# Altium PCB 16515.PcbDoc (part 1 of 2)
Units mil, origin at the board's own origin, x right, y up, seen from the top; angles counter-clockwise.
Board outline 3543.31 x 2500 mil, 6 copper layers (Top Layer, Layer 1, SIG_1, SIG_2, Layer 2, Bottom Layer), stack 56.912 mil thick; 73 components, 58 nets, 263 pads, 207 vias.
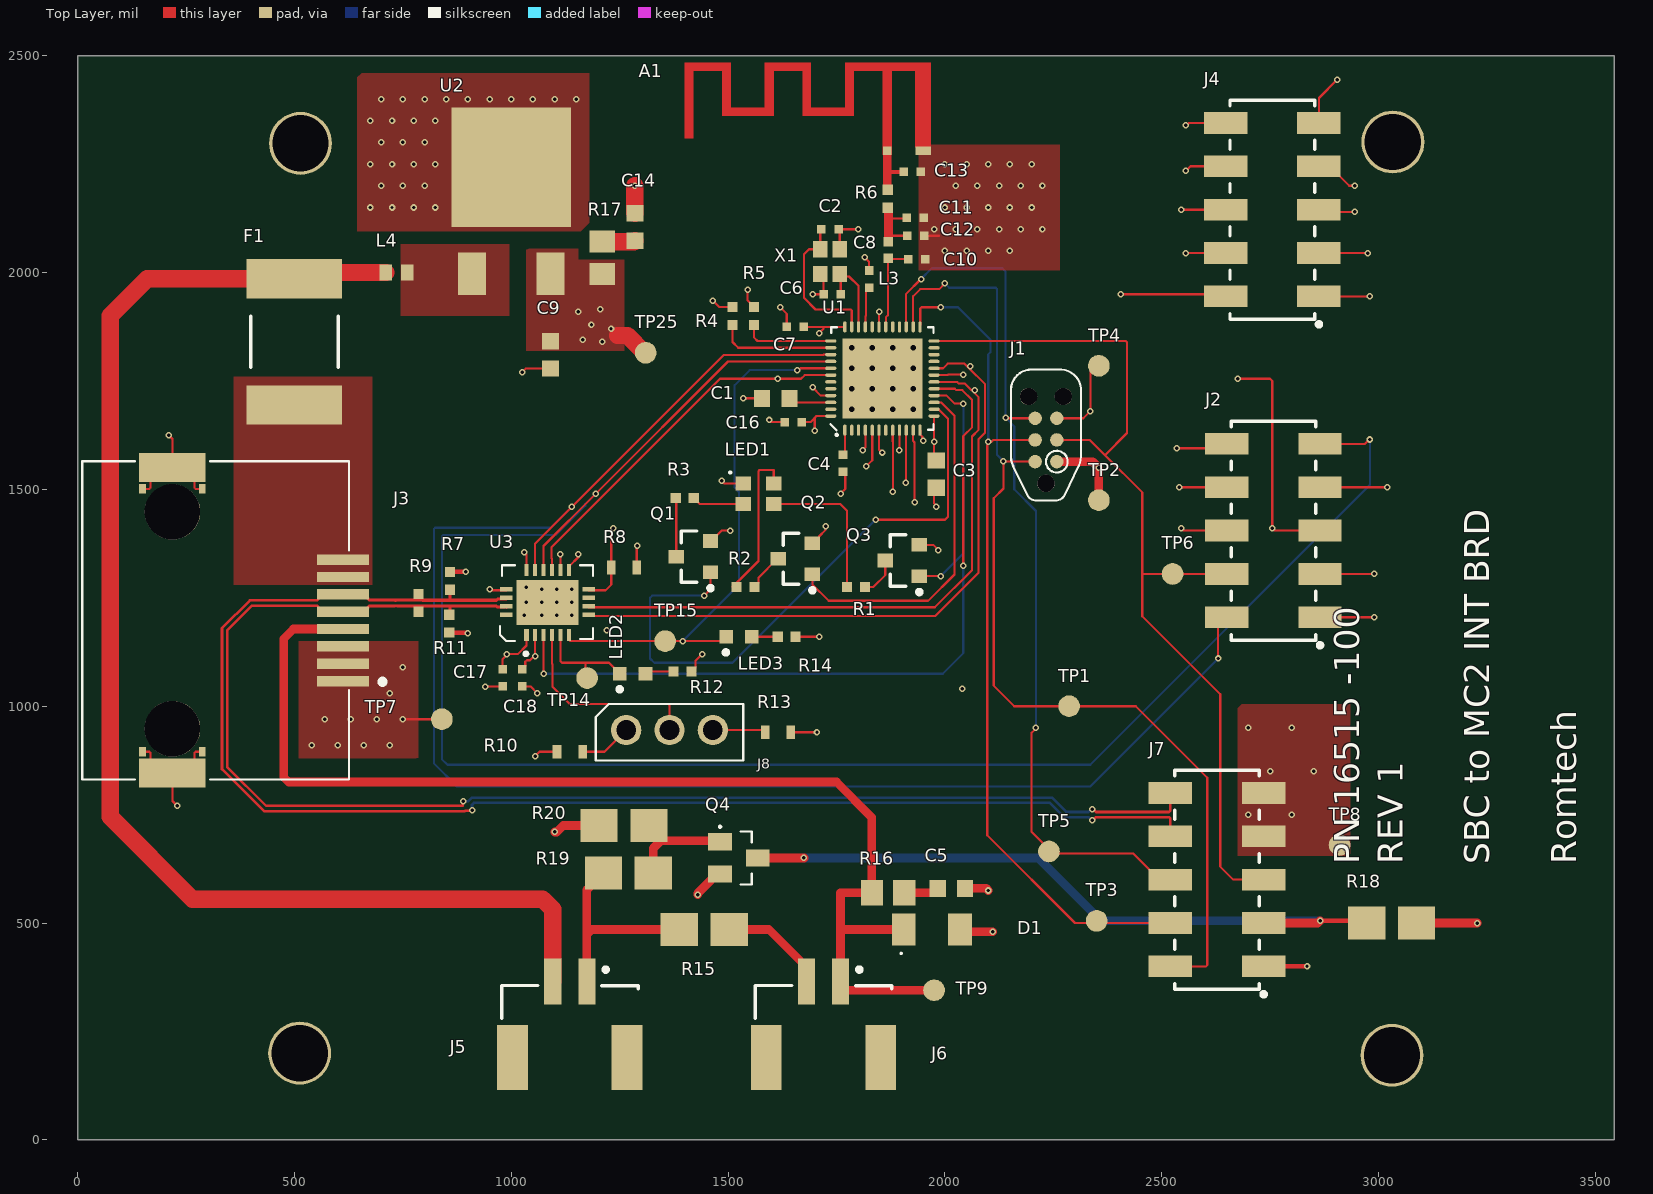
[diagram p0: Top Layer view]
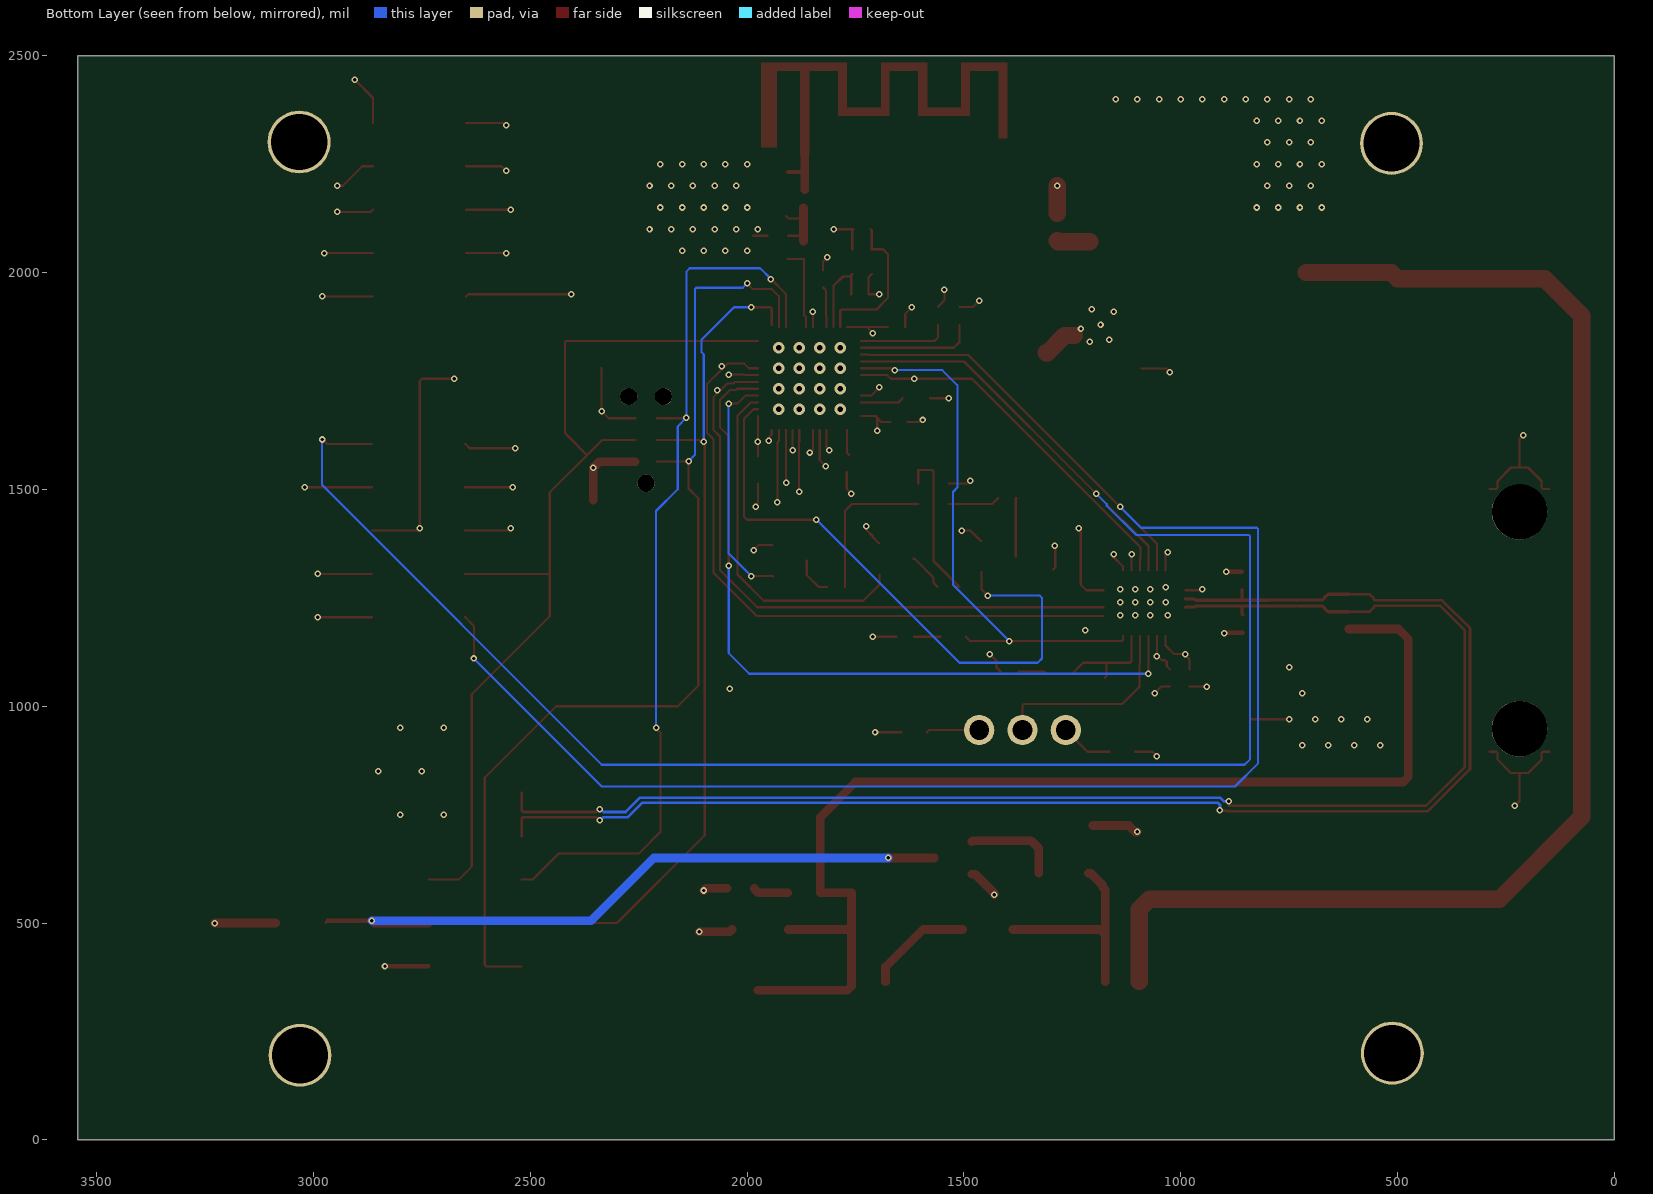
[diagram p1: Bottom Layer view, seen from below]
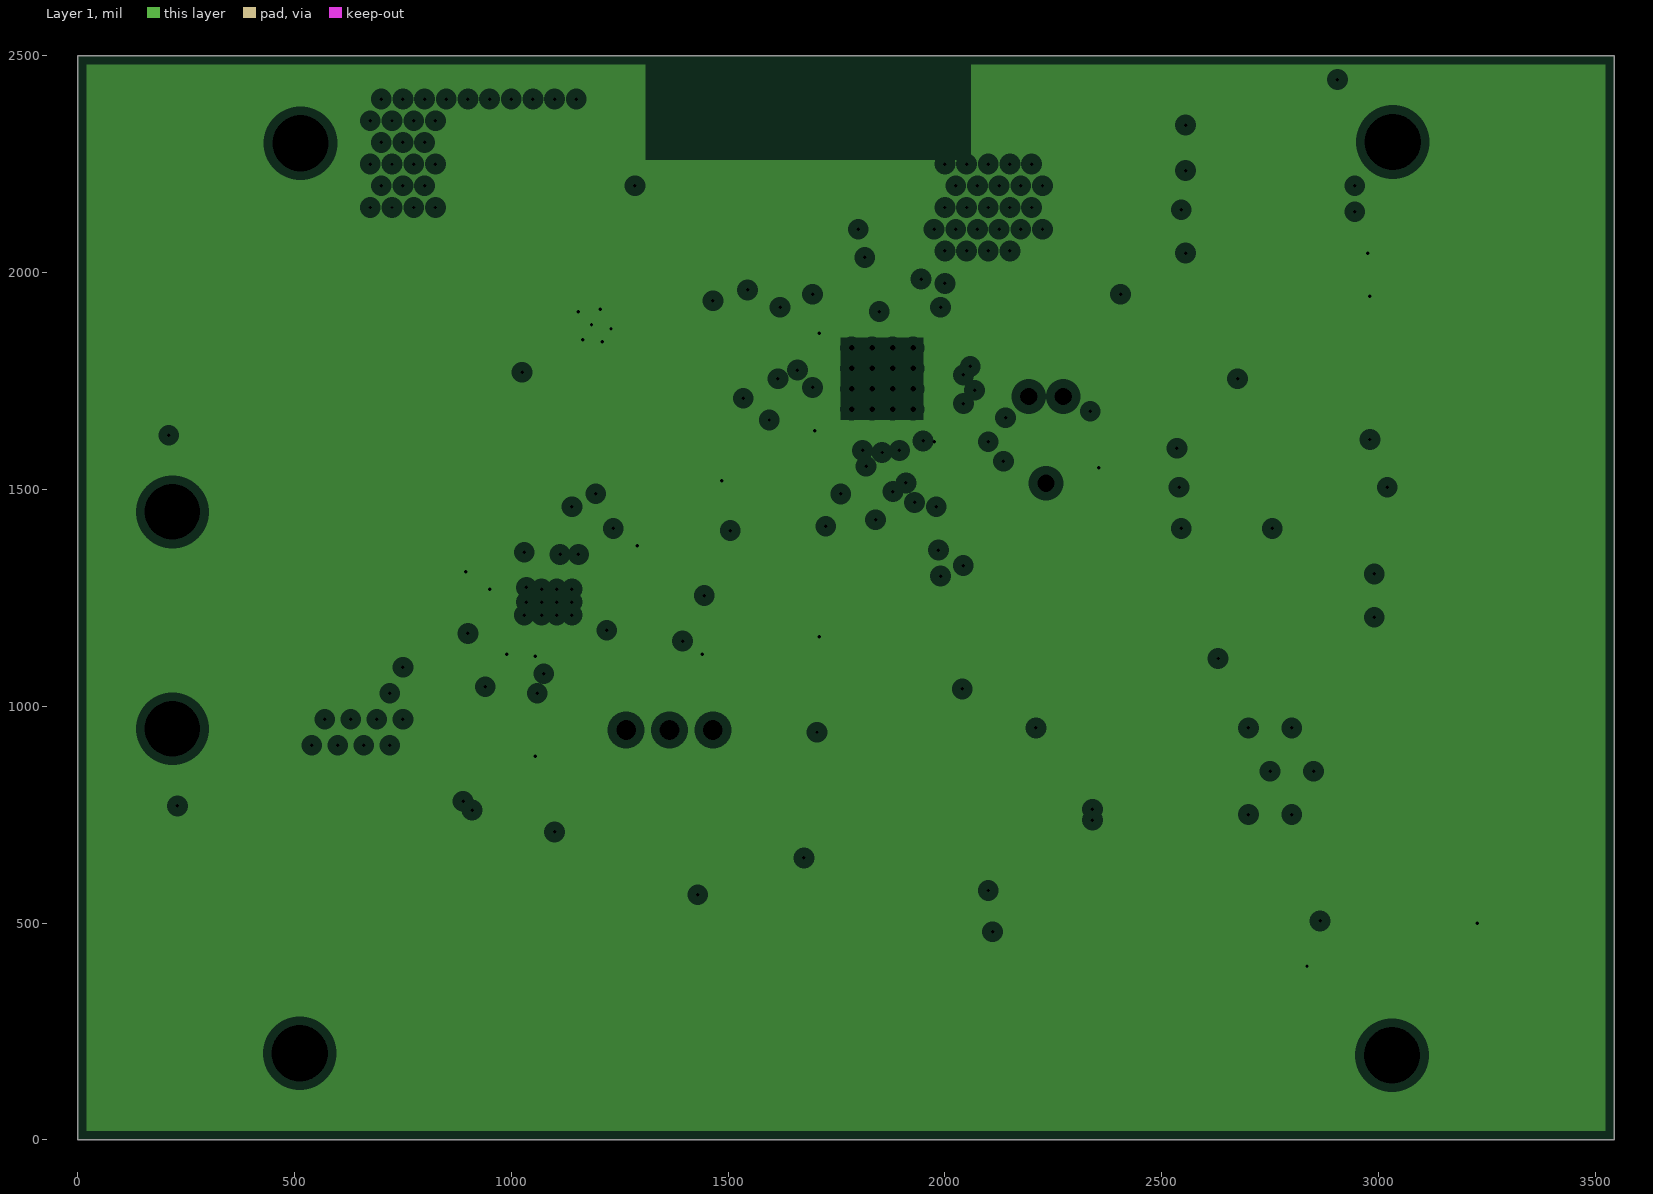
[diagram p2: Layer 1, clearances drawn from the general rule]
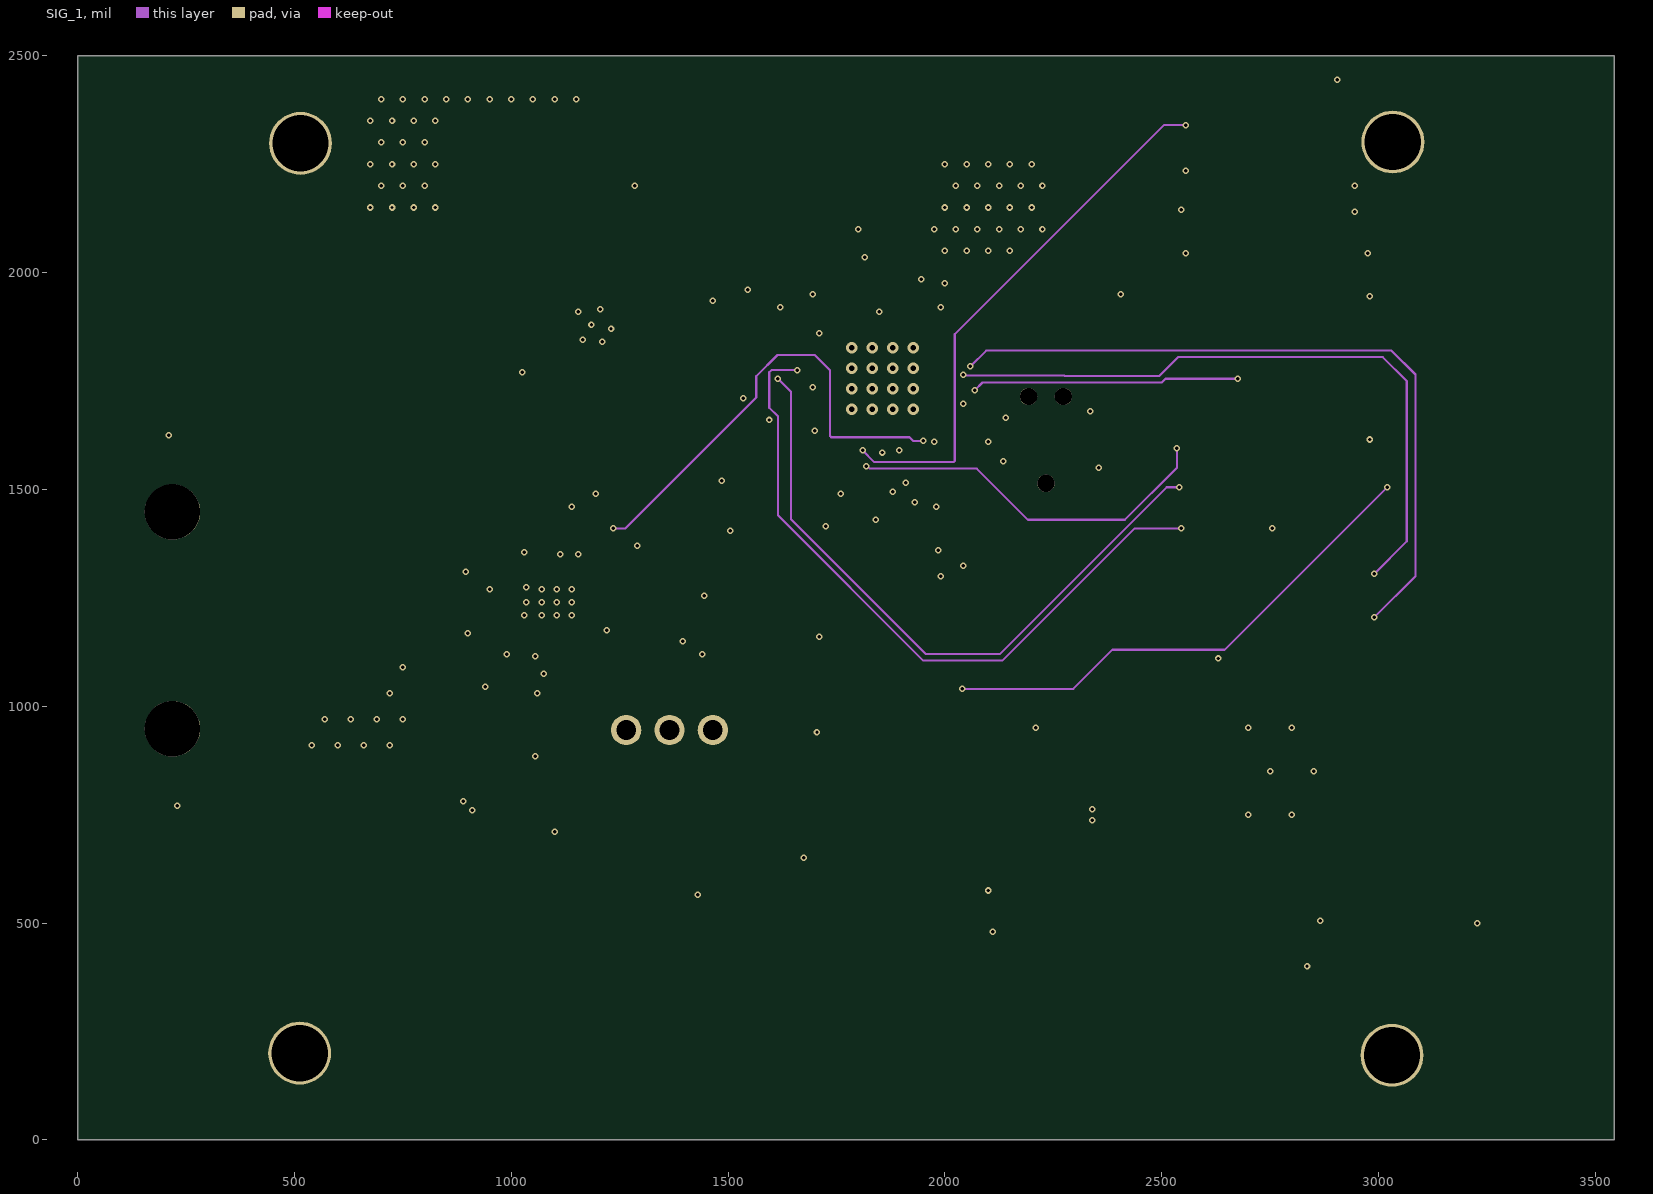
[diagram p3: SIG_1]
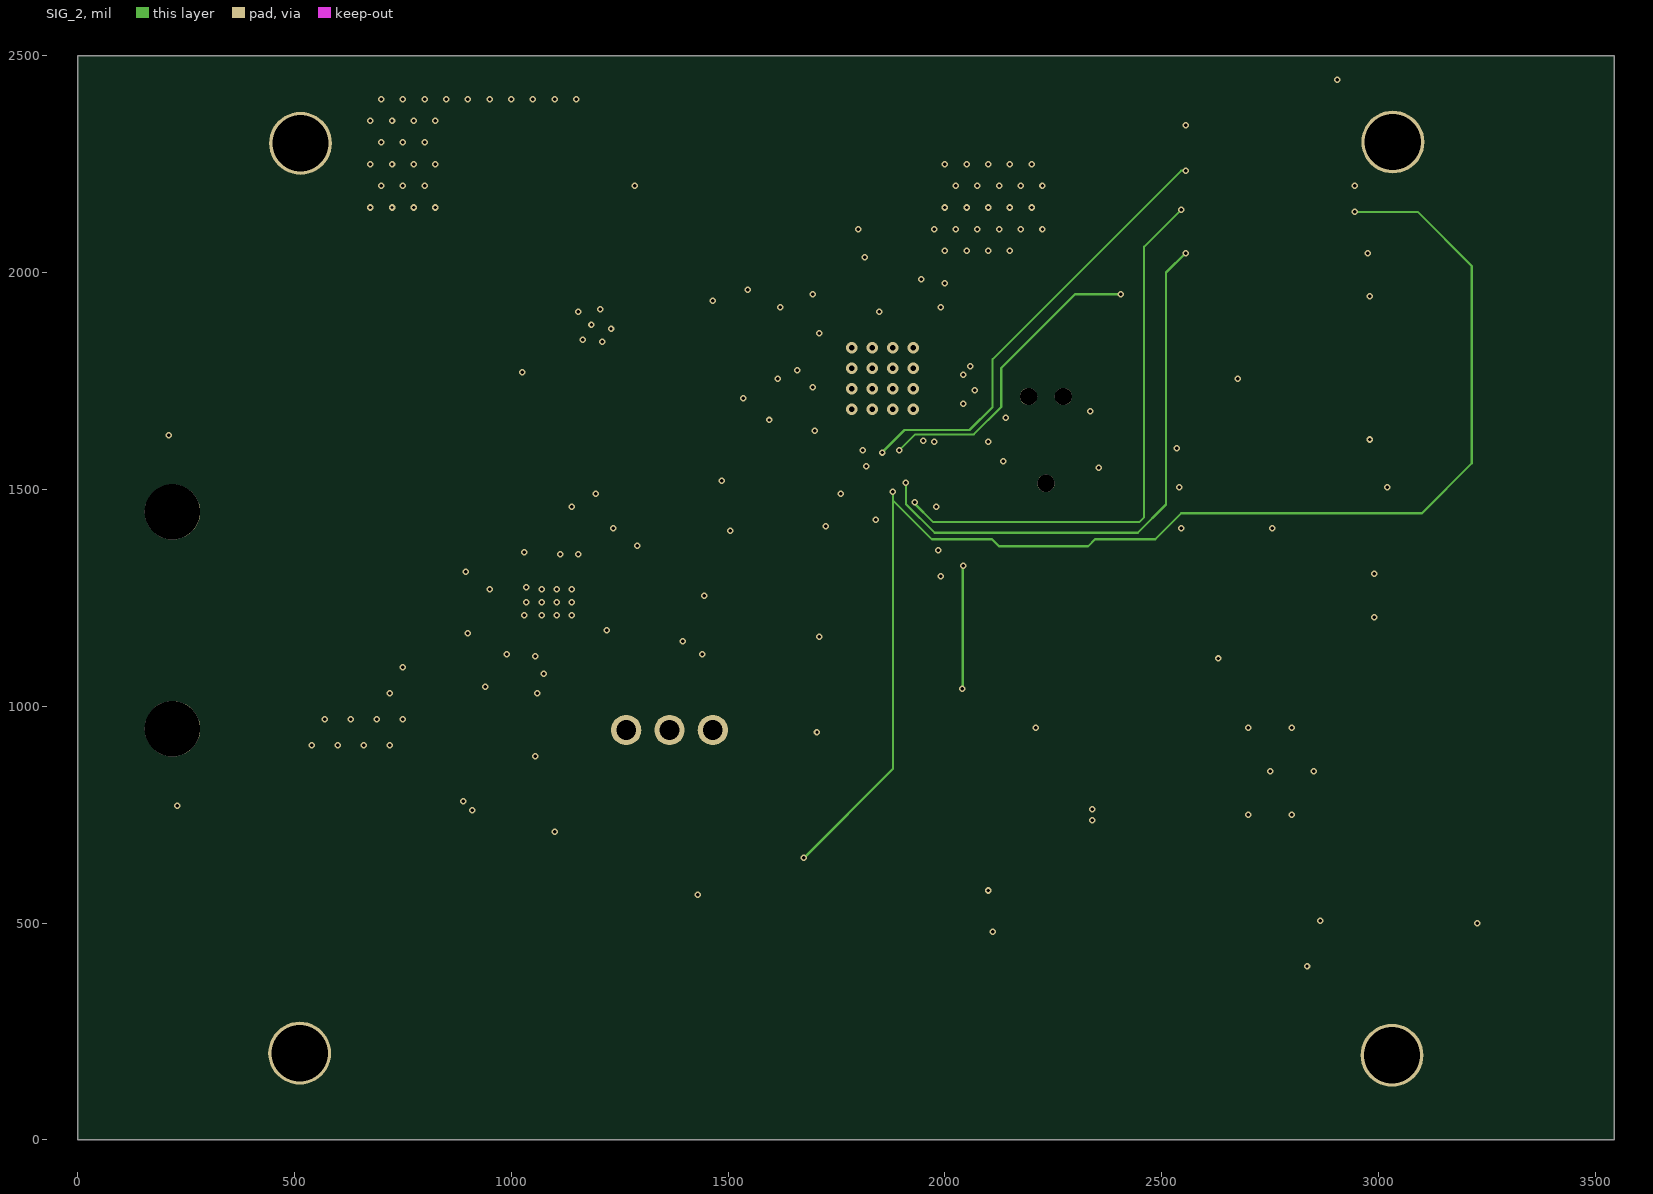
[diagram p4: SIG_2]
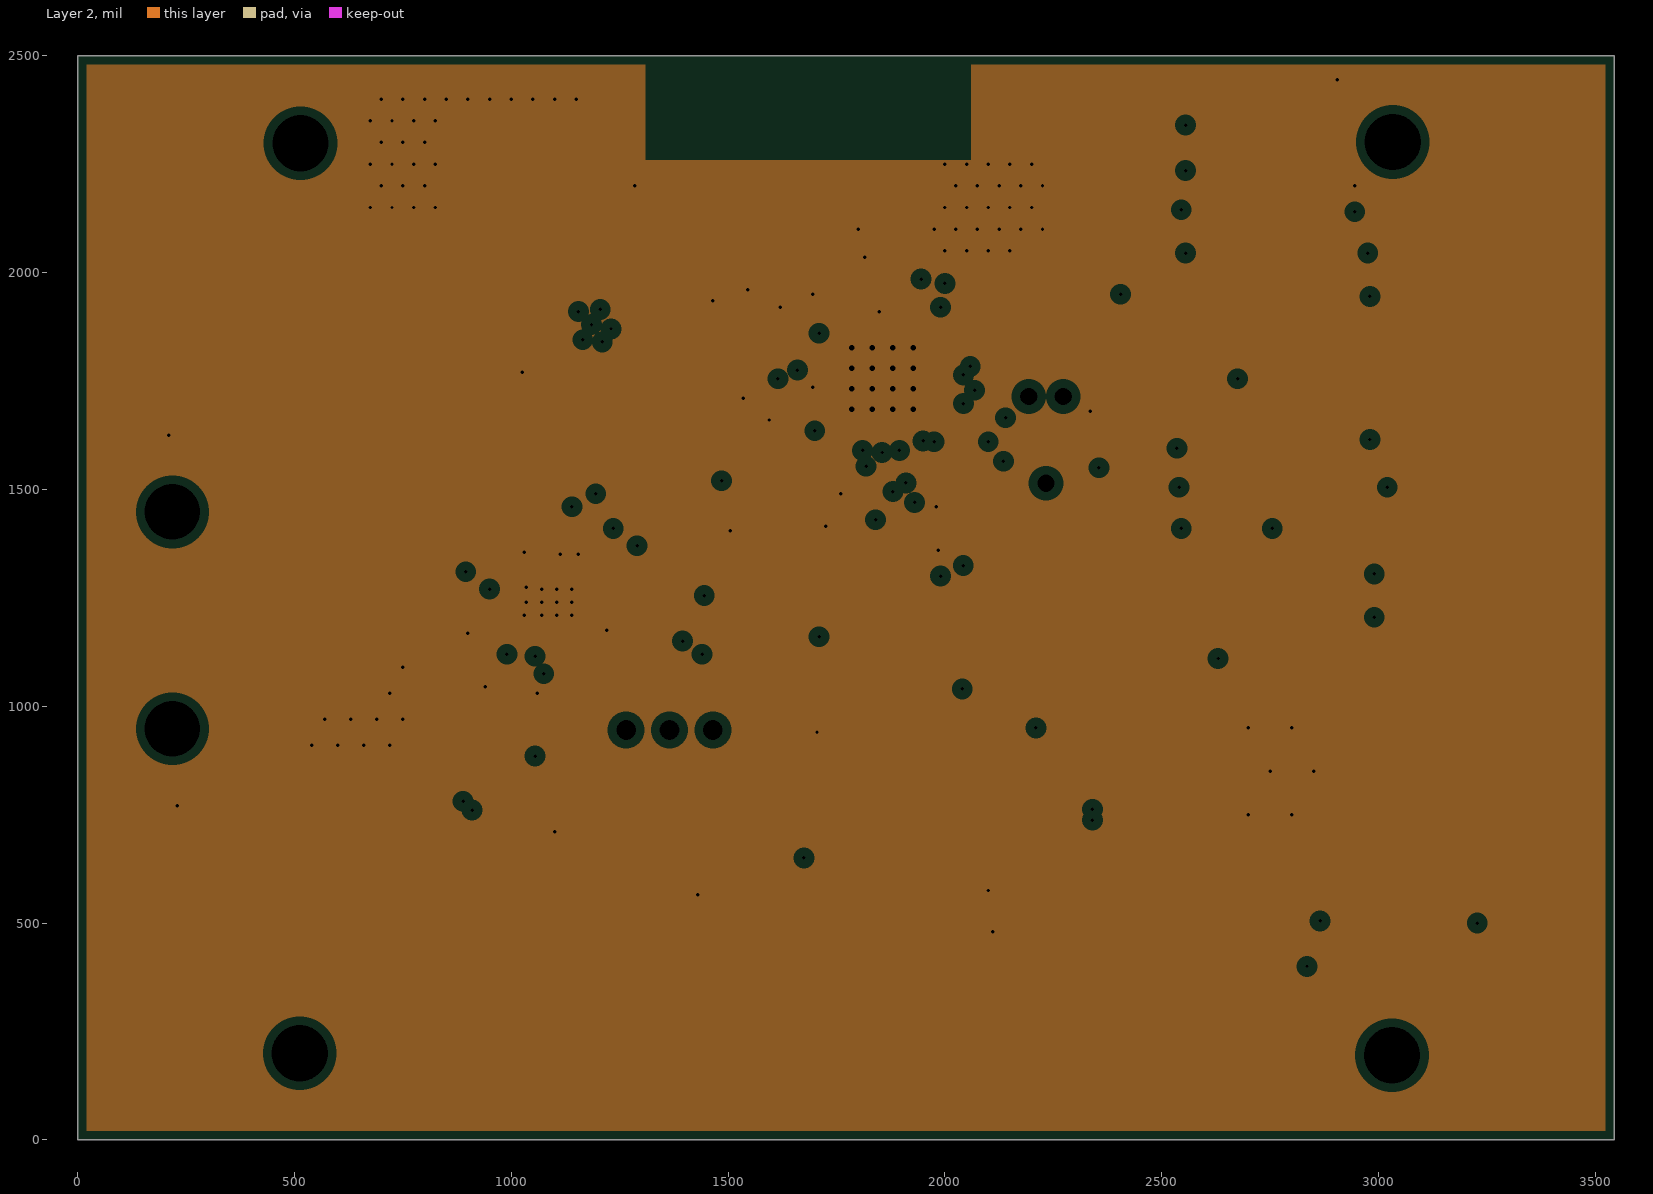
[diagram p5: Layer 2, clearances drawn from the general rule]
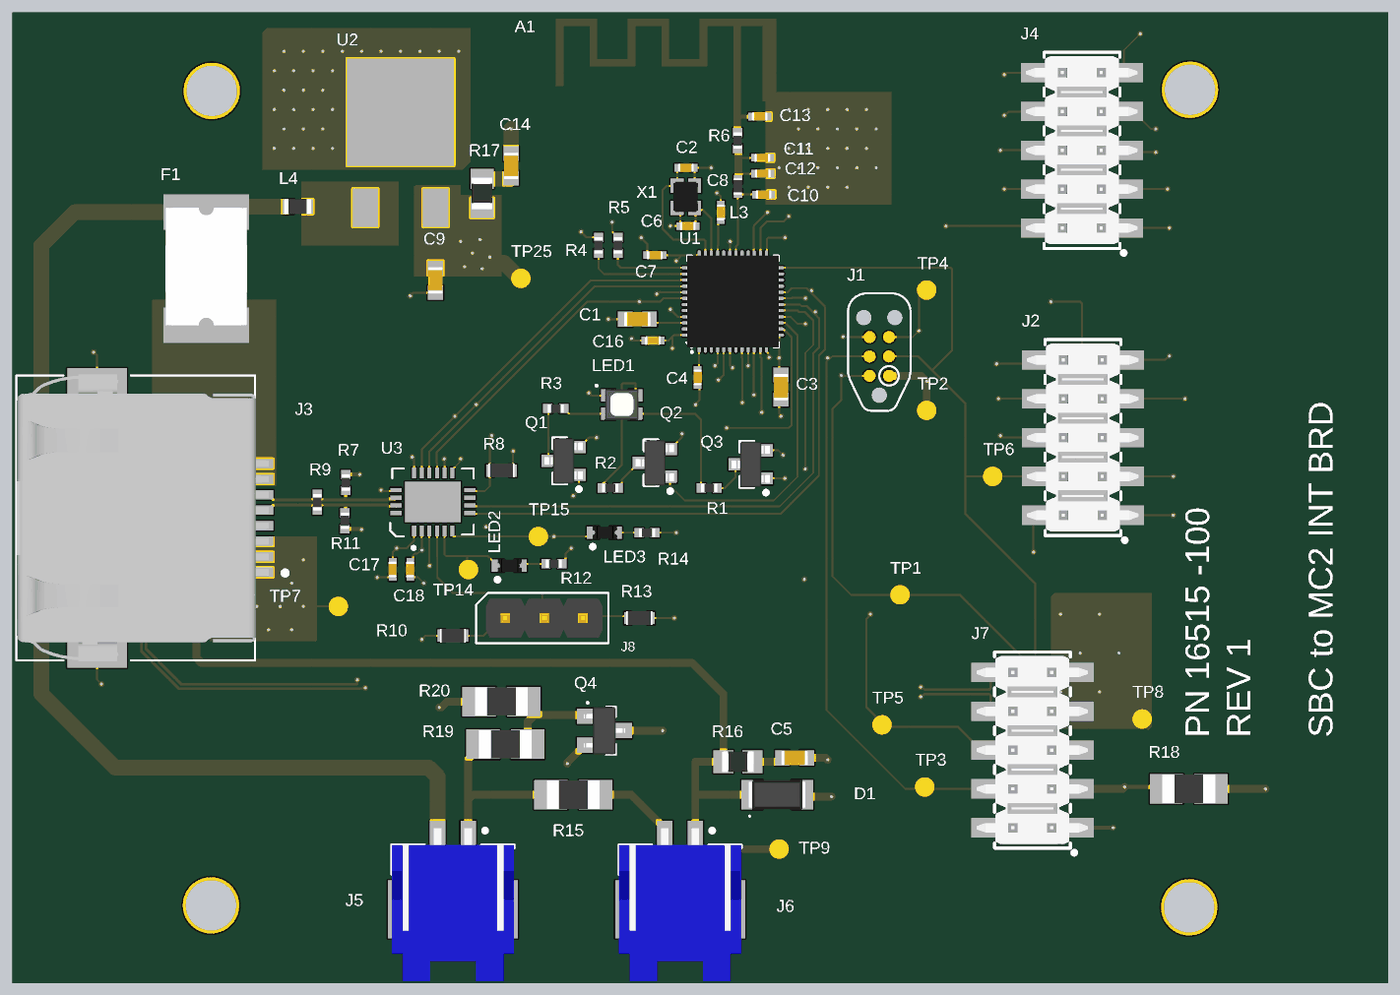
[diagram p6: 3D render of the assembled board from above, using the file's embedded part models]

## Layer stack, top to bottom
Top Solder: solder mask 0.4, Solder Resist, Dk 3.5
Top Layer: signal copper 1.4
Dielectric 2: prepreg 8, PP-006, Dk 4.1
Layer 1: plane copper 1.378, net 3.3V
Dielectric 4: prepreg 10, PP-006, Dk 4.1
SIG_1: signal copper 1.378
Dielectric 1: dielectric 12.6, FR-4, Dk 4.8
SIG_2: signal copper 1.378
Dielectric 5: prepreg 10, PP-006, Dk 4.1
Layer 2: plane copper 1.378, net GND
Dielectric 3: prepreg 8, PP-006, Dk 4.1
Bottom Layer: signal copper 1.4
Bottom Solder: solder mask 0.4, Solder Resist, Dk 3.5

## Board outline
0.25,0 0.25,2500 3543.56,2500 3543.56,0

## Design rules (kind name [scope] priority, off if disabled: settings)
Clearance [All] p1: gap=5 ignorepadtopadclearanceinfootprint=FALSE
DiffPairsRouting [All] p1: maxlimit=10 minlimit=6 mostfreqgap=6 toplayer_minwidth=6 toplayer_maxwidth=7.45 toplayer_prefwidth=7.45 midlayer1_minwidth=6 midlayer1_maxwidth=7.45 midlayer1_prefwidth=7.45 midlayer2_minwidth=6 midlayer2_maxwidth=7.45 midlayer2_prefwidth=7.45 bottomlayer_minwidth=6 bottomlayer_maxwidth=7.45 bottomlayer_prefwidth=7.45 maxuncoupledlength=500
HoleSize [All] p1: absolutevalues=TRUE maxlimit=200 minlimit=1 maxpercent=80.000 minpercent=20.000
MinimumSolderMaskSliver U3_paste [TouchesRoom('U3_room')] p1: minsoldermaskwidth=0
MinimumSolderMaskSliver J3_paste [TouchesRoom('J3_room')] p2: minsoldermaskwidth=0
MinimumSolderMaskSliver [All] p3: minsoldermaskwidth=2
PlaneClearance [All] p1: clearance=20
PlaneConnect PlaneConnect_1 [All] p1: planeconnectstyle=Direct reliefexpansion=20 reliefentries=4 reliefconductorwidth=10 reliefairgap=10
PlaneConnect [InComponent('U1')] p2: planeconnectstyle=Direct reliefexpansion=20 reliefentries=4 reliefconductorwidth=10 reliefairgap=10
PolygonConnect [All] p1: connectstyle=Direct reliefconductorwidth=10 reliefentries=4 polygonreliefangle="90 Angle" airgapwidth=10
RoomDefinition U3_room [False] p1: confinementstyle=ConfineIn formatcopy=TRUE lockcomponents=FALSE outline 926,1364 1224,1364 1224,1111 926,1111
RoomDefinition J3_room [False] p2: confinementstyle=ConfineIn formatcopy=TRUE lockcomponents=FALSE outline 3,1613 759,1613 759,705 3,705
RoutingVias [All] p1: holewidth=8 width=15 viastyle="Through Hole" minholewidth=8 minwidth=15 maxholewidth=10 maxwidth=20
ShortCircuit [InNet('RF') and InPadClass('A1-ANT') vs InNet('GND')] p1: allowed=TRUE
ShortCircuit ShortCircuit_1 [All] p2: allowed=FALSE
SilkToSolderMaskClearance [IsPad] p1: minsilkscreentomaskgap=5 clearancetoexposedcopper=TRUE
SolderMaskExpansion [All] p1: expansion=4 istentingtop=FALSE
Width [All] p1: maxlimit=40 minlimit=5 preferedwidth=10
23 further rules are at their usual default settings.

## Classes and differential pairs
differential pair PC: +PC_P -PC_N

## Components (designator, comment, footprint, x,y, rotation, side; value= is the part's Value field where it differs from the comment)
A1 "MIFI Antenna" "BLE Antenna" 1867,2282 r270 top
C1 "1.0uF" CAPC0603X10N 1610,1710 r0 top
C2 "12pF" CAPC0402X06N 1735,2100 r0 top
C3 "4.7uF" CAPC0603X10N 1980,1535 r270 top
C4 "0.1uF" CAPC0402X06N 1765,1560 r270 top
C5 "100pF" CAPC0603X10N 2015,580 r0 top
C6 "12pF" CAPC0402X06N 1740,1950 r180 top
C7 "0.1uF" CAPC0402X06N 1655,1875 r180 top
C8 "100pF" CAPC0402X06N 1825,1985 r90 top
C9 "4.7uF" CAPC0603X10N 1090,1810 r90 top
C10 "0.8pF" CAPC0402X06N 1935,2031 r180 top
C11 "DNI" CAPC0402X06N 1932,2126 r0 top
C12 "DNI" CAPC0402X06N 1933,2085 r0 top
C13 "DNI" CAPC0402X06N 1925,2232 r0 top
C14 "100pF" CAPC0603X10N 1285,2105 r90 top
C16 "0.1uF" CAPC0402X06N 1650,1655 r180 top
C17 "4.7uF" CAPC0402X06N 980,1065.31 r90 top
C18 "1uF" CAPC0402X06N 1025,1065.31 r90 top
D1 "BZT52C12-13-F" SOD-123/Mini-SMA 1970,485 r180 top
F1 "Fuse" FUSE2920 500,1840 r90 top
J1 "SWD" TC2030-IDC-NL 2233,1614 r90 top
J2 "95278-101A10LF" Amphenol_95278-101A10LF_0 2757.52,1405 r90 top
J3 "6339160-1" TE_6339160-1 612.4,1198 r270 top
J4 "95278-101A10LF" Amphenol_95278-101A10LF_0 2755,2145 r90 top
J5 "SM02B-PASS-TBT(LF)(SN)" SM02B-PASS-TBT(LF)(SN) 1135,180 r180 top
J6 "SM02B-PASS-TBT(LF)(SN)" SM02B-PASS-TBT(LF)(SN) 1720,180 r180 top
J7 "95278-101A10LF" Amphenol_95278-101A10LF_0 2627.52,600 r90 top
J8 "3 POS Header" 3_POS_Header 1265,945 r0 top
L3 "3.9nH" INDC0402X04N 1869,2052 r90 top
L4 "330 Ohms @100 Mhz" INDC0603X10N 735.39,2000 r0 top
LED1 "ASMB-KTF0-0A306" ASMB-KTF0-0A306 1570,1490 r0 top
LED2 "GREEN" 0603 1280,1075 r90 top
LED3 "GREEN" 0603 1525,1160 r90 top
Q1 "2SK3018T106" SOT23 1420,1345 r180 top
Q2 "2SK3018T106" SOT23 1655,1340 r180 top
Q3 "2SK3018T106" SOT23 1901.65,1336.02 r180 top
Q4 "BSS138K" SOT-23-3 1525,650 r0 top
R1 "1K" RESC0402X04N 1795,1275 r180 top
R2 "1K" RESC0402X04N 1540,1275 r180 top
R3 "1K" RESC0402X04N 1400,1480 r0 top
R4 "1K" RESC0402X04N 1510,1900 r90 top
R5 "1K" RESC0402X04N 1560,1900 r90 top
R6 "0" RESC0402X04N 1868,2170 r90 top
R7 "620R" RESC0402X04N 859,1289 r90 top
R8 "10K" RESC0603X06N 1260,1320 r0 top
R9 "110R" RESC0402X04N 786,1238.33 r90 top
R10 "10K" RESC0603X06N 1135,895 r0 top
R11 "620R" RESC0402X04N 857,1190.33 r90 top
R12 "1K" RESC0402X04N 1395,1080 r180 top
R13 "10K" RESC0603X06N 1615,940 r180 top
R14 "1K" RESC0402X04N 1635,1160 r180 top
R15 "2K" RESC1206X09N 1445,485 r180 top
R16 "1k" RESC0805X06N 1870,570 r0 top
R17 "1k" RESC0805X06N 1210,2035 r90 top
R18 "2K" RESC1206X09N 3030,500 r180 top
R19 "10K" RESC1206X09N 1270,615 r180 top
R20 "1.5 K" RESC1206X09N 1260,725 r180 top
TP1 "=VALUE" "Test Point" 2286.36,1000 r90 top
TP2 "=VALUE" "Test Point" 2355,1475 r90 top
TP3 "=VALUE" "Test Point" 2350,505 r90 top
TP4 "=VALUE" "Test Point" 2355,1785 r90 top
TP5 "=VALUE" "Test Point" 2240,665 r90 top
TP6 "=VALUE" "Test Point" 2525,1305 r90 top
TP7 "=VALUE" "Test Point" 840,970 r90 top
TP8 "=VALUE" "Test Point" 2910,680 r90 top
TP9 "=VALUE" "Test Point" 1975,345 r90 top
TP14 "=VALUE" "Test Point" 1175,1065 r90 top
TP15 "=VALUE" "Test Point" 1355,1150 r270 top
TP25 "=VALUE" "Test Point" 1310,1815 r90 top
U1 "NRF52832-QFAA-R" QFN40P600X600X90-48N 1855.91,1755.63 r90 top
U2 "BA033CC0FP-E2" TO252-3_BA033CC0FP-E2 1000,2120 r0 top
U3 "LTC4331CUFD#PBF" 20-WFQFN 1083.68,1239.21 r0 top
X1 "32MHz" BT-XTAL_2016 1735,2025 r90 top

## Footprints (in the part's own frame and the unit in brackets; to place one, negate y for a bottom-side part, rotate by r counter-clockwise, add the part's x,y. Pads: shape width x height; smd on the part's side, far side on the other; paste and mask are expansions set on the pad)
3_POS_Header [mil] "100_mil_pitch"
  round 70 hole 45.28: 1(0,0) 2(100,0) 3(200,0)
  silkscreen extent -70,-70 270,60, body extent -45,-55 255,45, height 337
20-WFQFN [mil]
  rect 11.8x27.6 smd: 1(-48.68,-74.8)
  rect 9.8x27.6 smd: 2(-29,-74.8) 3(-9.31,-74.8) 4(10.38,-74.8) 5(30.06,-74.8) 6(49.75,-74.8) 11(49.75,74.8) 12(30.06,74.8) 13(10.38,74.8) 14(-9.31,74.8) 15(-29,74.8) 16(-48.68,74.8)
  rect 29x11 smd: 7(94.98,-28.5) 8(94.98,-8.8) 9(94.98,10.9) 10(94.98,30.6) 17(-94.98,30.6) 18(-94.98,10.9) 19(-94.98,-8.8) 20(-94.98,-28.5)
  rect 143.7x104.33 smd: EP(0,0)
  silkscreen extent -110,-121 105,86, body extent -100,-80 100,82, height 31
0603 [mm] "0603 Discrete LED"
  rect 0.8x0.8 smd paste+0: 1(0,-0.75) 2(0,0.75)
  silkscreen extent -1.04,0.64 -0.79,0.89, body extent -0.55,-1.25 0.55,1.25, height 0.25
Amphenol_95278-101A10LF_0 [mm]
  rect 1.27x2.54 smd paste+0 mask+0: 1(-5.08,-2.73) 2(-5.08,2.73) 3(-2.54,-2.73) 4(-2.54,2.73) 5(0,-2.73) 6(0,2.73) 7(2.54,-2.73) 8(2.54,2.73) 9(5.08,-2.73) 10(5.08,2.73)
  silkscreen extent -6.84,-2.86 6.42,2.48, body extent -6.15,-3.63 6.15,3.66, height 9.66
ASMB-KTF0-0A306 [mm]
  rect 0.9x0.8 smd: 1(-0.9,0.6) 2(-0.9,-0.6) 3(0.9,-0.6) 4(0.9,0.6)
  silkscreen extent -1.71,1.18 -1.59,1.31, body extent -1.1,-1 1.1,1, height 1.88
"BLE Antenna" [mil] "2.45 GHz Bluetooth antenna"
  rect 20x20 smd paste-40 mask-31: ANT(1,0)
  rect 20x36 smd paste-40 mask-31: GND(1,82.68)
  Top Layer region: -8.84,0 -8.84,-10 -18.84,-10 -18.84,0
  Top Layer region: 10.69,9.84 -183,9.84 -183,64.96 -7,64.96 -7,100.39 -202,100.39 -202,-97 -98,-97 -98,-176 -202,-176 -202,-282 -98,-282 -98,-361 -202,-361 -202,-467 -28,-467 -28,-447 -183,-447 -183,-380 -79,-380 -79,-262 -183,-262 -183,-195 -79,-195 -79,-77 -183,-77 -183,-10 10.69,-10
BT-XTAL_2016 [mm]
  rect 0.95x0.85 smd mask+0.097: 1(-0.725,-0.575) 2(0.725,-0.575) 3(0.725,0.575) 4(-0.725,0.575)
  body extent -1,-0.79 1,0.81, height 0.52
CAPC0402X06N [mm] "Chip Capacitor, 2-Leads, Body 04x02mil, IPC Medium Density"
  rect 0.5x0.5 smd: 1(-0.5,0) 2(0.5,0)
  body extent -0.53,-0.28 0.53,0.28, height 0.55
CAPC0603X10N [mm] "Chip Capacitor, 2-Leads, Body 06x03mil, IPC Medium Density"
  rect 0.95x1 smd: 1(-0.8,0) 2(0.8,0)
  body extent -0.87,-0.48 0.87,0.48, height 0.8
FUSE2920 [mm] "SMD Fuse, 29x20mil"
  rect 2.3x5.6 smd paste+0 mask+0: 1(-3.7,0) 2(3.7,0)
  silkscreen extent -1.5,-2.56 1.5,2.56, body extent -3.71,-2.65 4,2.65, height 1.02
INDC0402X04N [mm] "Chip Inductor, 2-Leads, Body 04x02mil, IPC Medium Density"
  rect 0.55x0.55 smd: 1(-0.475,0) 2(0.475,0)
  body extent -0.55,-0.3 0.55,0.3, height 0.45
INDC0603X10N [mm] "Chip Inductor, 2-Leads, Body 06x03mil, IPC Medium Density"
  rect 0.75x0.95 smd: 1(-0.625,0) 2(0.625,0)
  body extent -0.9,-0.5 0.9,0.5, height 1
QFN40P600X600X90-48N [mm]
  oval 0.65x0.2 smd: 1(-3.025,2.2) 2(-3.025,1.8) 3(-3.025,1.4) 4(-3.025,1) 5(-3.025,0.6) 6(-3.025,0.2) 7(-3.025,-0.2) 8(-3.025,-0.6) 9(-3.025,-1) 10(-3.025,-1.4) 11(-3.025,-1.8) 12(-3.025,-2.2) 25(3.025,-2.2) 26(3.025,-1.8) 27(3.025,-1.4) 28(3.025,-1) 29(3.025,-0.6) 30(3.025,-0.2) 31(3.025,0.2) 32(3.025,0.6) 33(3.025,1) 34(3.025,1.4) 35(3.025,1.8) 36(3.025,2.2)
  oval 0.2x0.65 smd: 13(-2.2,-3.025) 14(-1.8,-3.025) 15(-1.4,-3.025) 16(-1,-3.025) 17(-0.6,-3.025) 18(-0.2,-3.025) 19(0.2,-3.025) 20(0.6,-3.025) 21(1,-3.025) 22(1.4,-3.025) 23(1.8,-3.025) 24(2.2,-3.025) 37(2.2,3.025) 38(1.8,3.025) 39(1.4,3.025) 40(1,3.025) 41(0.6,3.025) 42(0.2,3.025) 43(-0.2,3.025) 44(-0.6,3.025) 45(-1,3.025) 46(-1.4,3.025) 47(-1.8,3.025) 48(-2.2,3.025)
  rect 4.7x4.7 smd: 49(0,0)
  silkscreen extent -3.37,-3 3,3.05, body extent -3.02,-3.02 3.02,3.02, height 0.86
RESC0402X04N [mm] "Chip Resistor, 2-Leads, Body 4x2mil, IPC Medium Density"
  rect 0.6x0.6 smd: 1(-0.525,0) 2(0.525,0)
  body extent -0.53,-0.28 0.53,0.28, height 0.4
RESC0603X06N [mm] "Chip Resistor, 2-Leads, Body 06x03mil, IPC Medium Density"
  rect 0.5x0.8 smd: 1(-0.75,0) 2(0.75,0)
  body extent -0.85,-0.45 0.85,0.45, height 0.55
RESC0805X06N [mm] "Chip Resistor, 2-Leads, Body 08x05mil, IPC Medium Density"
  rect 1.3x1.5 smd: 1(0.925,0) 2(-0.975,0)
  body extent -1.08,-0.68 1.02,0.67, height 0.6
RESC1206X09N [mm] "Chip Resistor, 2-Leads, Body 12x06mil, IPC Medium Density"
  rect 2.18x1.93 smd: 1(-1.46,0) 2(1.46,0)
  body extent -1.73,-0.92 1.73,0.92, height 0.89
SM02B-PASS-TBT(LF)(SN) [mm] "Connector Header Surface Mount, Right Angle 2 position 0.079\" (2.00mm)"
  rect 1x2.7 smd paste+0: 1(-1,-4.7) 2(1,-4.7)
  rect 1.8x3.8 smd paste+0: 3(-3.35,-0.25) 3(3.35,-0.25)
  silkscreen extent -4,-5.52 3.99,-2.54, body extent -4,-5.55 4,4.45, height 5.7
SOD-123/Mini-SMA [mm] "SOD, 2-Leads, Body 1.70x3.70mm, IPC Medium Density"
  rect 1.4x1.9 smd: 1(-1.65,0) 2(1.65,0)
  silkscreen extent 1.75,1.35 1.85,1.45, body extent -1.85,-0.95 1.85,0.95, height 1.7
SOT23 [mm] "SOT23, 3-Leads, Body 3x1.40mm, Pitch 1.83mm, IPC Medium Density"
  rect 0.9x0.8 smd: 1(-1,0.915) 2(-1,-0.915) 3(1,0)
  silkscreen extent -1.12,-1.5 0.7,1.97, body extent -1.25,-1.5 1.25,1.5, height 1.1
SOT-23-3 [mm] "SOT23-3, 3-Leads, Body 2.92x2.40mm, Pitch 0.95mm, IPC Medium Density"
  rect 1.4x1 smd: 1(-1.1,0.95) 2(-1.1,-0.95) 3(1.1,0)
  silkscreen extent -1.16,-1.56 0.75,1.89, body extent -1.35,-1.56 1.35,1.56, height 1.2
TC2030-IDC-NL [mil]
  round 31 smd paste-31: 1(-50,-25) 2(-50,25) 3(0,-25) 4(0,25) 5(50,-25) 6(50,25)
  round 40 hole 40 unplated mask+8: None(-100,0) None(100,-40) None(100,40)
  Top Layer pour cut-out: -90,-61 -90,61 90,61 90,-61
  silkscreen extent -140,-81 162,81
TE_6339160-1 [mm]
  rect 0.61x3.05 smd: 1(3.556,0) 2(2.54,0) 3(1.524,0) 4(0.508,0) 5(-0.508,0) 6(-1.524,0) 7(-2.54,0) 8(-3.556,0)
  rect 1.702x3.9 smd: SH1(-8.948,-10) SH2(8.948,-10)
  rect 0.555x0.4 smd: SH1_1(-7.7,-8.25) SH1_2(-7.7,-11.75) SH2_1(7.7,-8.25) SH2_2(7.7,-11.75)
  round 3.25 hole 3.25 unplated: ""(-6.35,-10) ""(6.35,-10)
  silkscreen extent -9.32,-15.28 9.32,2.4, body extent -9.4,-15.24 9.4,1.24, height 14.78
"Test Point" [mil] "50 mil exposed copper test point"
  round 50 smd paste-1220.47 mask+0: 1(0,0)
  body extent -25,-25 25,25, height 15
TO252-3_BA033CC0FP-E2 [mil]
  rect 65x98.5 smd: 1(-90.5,-123) 2(90.5,-123)
  rect 276x276 smd: 3(0,123)
  body extent -165,-70 160,190, height 100

## Part data
A1: library part ANT, "Antenna"
C1: library part "Cap NP", "1µF ±10% 6.3V Ceramic Capacitor X5R 0603 (1608 Metric)", Capacitance=1uF, Case Code (Imperial)=0603, Case Code (Metric)=1608, Dielectric=X5R, Manufacturer 1=Samsung, Manufacturer Part Number 1=CL10A105KQ8NNNC, Max Operating Temperature=85°C, Min Operating Temperature=-55°C, Package Quantity=1, Supplier Part Number 1=1276-1036-2-ND, Tolerance=10%, Voltage Rating=6.3V, Case/Package=0603, ComponentLink1Description=https://datasheet.ciiva.com/26838/getdatasheetpartid-355285-26838337.pdf?src-supplier=Verical, ComponentLink1URL=https://datasheet.ciiva.com/26838/getdatasheetpartid-355285-26838337.pdf?src-supplier=Verical, ComponentLink2Description=https://datasheet.ciiva.com/25801/cl10a105kq8nnnc-25801975.pdf?src-supplier=Digi-Key, ComponentLink2URL=https://datasheet.ciiva.com/25801/cl10a105kq8nnnc-25801975.pdf?src-supplier=Digi-Key, ComponentLink3Description=https://datasheet.ciiva.com/16199/cl10a105ko8nnnc-16199274.pdf?src-supplier=Future+Electronics, ComponentLink3URL=https://datasheet.ciiva.com/16199/cl10a105ko8nnnc-16199274.pdf?src-supplier=Future+Electronics, Depth=0.8mm, Height=0.8mm, Lead Free="Lead Free", Length=1.6mm, Mount="Surface Mount", Packaging="Tape and Reel", Pricing 1="4000=0.00607, 8000=0.00554, 12000=0.00528, 28000=0.00502, 100000=0.00363 (USD)", Radiation Hardening=No, RoHS=Yes, Stock 1=964000, Supplier 1=Digi-Key, Thickness=0.035inch, Voltage Rating (DC)=6.3V, Width=0.031inch
C2 C6: library part "Cap NP", "12pF ±5% 25V Ceramic Capacitor C0G, NP0 0402 (1005 Metric)", Case Code (Imperial)=0402, Case Code (Metric)=1005, Dielectric=C0G, Manufacturer 1=Murata, Manufacturer Part Number 1=GRM1555C1E120JA01D, Max Operating Temperature=125°C, Min Operating Temperature=-55°C, Package Quantity=10000, Supplier Part Number 1=490-8170-2-ND, Tolerance=5%, Voltage Rating=25V, Capacitance=12pF, Case/Package=0402, ComponentLink1Description=https://datasheet.ciiva.com/29542/grm1555c1e120ja01-01-29542163.pdf?src-supplier=Digi-Key, ComponentLink1URL=https://datasheet.ciiva.com/29542/grm1555c1e120ja01-01-29542163.pdf?src-supplier=Digi-Key, ComponentLink2Description=https://datasheet.ciiva.com/29542/partnumbering-e-01-29542165.pdf?src-supplier=Digi-Key, ComponentLink2URL=https://datasheet.ciiva.com/29542/partnumbering-e-01-29542165.pdf?src-supplier=Digi-Key, ComponentLink3Description=https://datasheet.ciiva.com/16467/product-16467323.pdf?src-supplier=Future+Electronics, ComponentLink3URL=https://datasheet.ciiva.com/16467/product-16467323.pdf?src-supplier=Future+Electronics, Depth=0.5mm, Height=0.5mm, Lead Free="Lead Free", Length=1mm, Mount="Surface Mount", Packaging="Tape and Reel", Pricing 1="10000=0.00588, 20000=0.00560, 30000=0.00532, 50000=0.00476, 100000=0.00420 (USD)", Radiation Hardening=No, RoHS=Yes, Stock 1=110000, Supplier 1=Digi-Key, Termination=SMD/SMT, Thickness=0.022inch, Voltage Rating (DC)=25V, Width=0.02inch
C3 C9: library part "Cap NP", "4.7µF ±10% 35V Ceramic Capacitor X5R 0603 (1608 Metric)", Case Code (Imperial)=0603, Case Code (Metric)=1608, Dielectric=X5R, Manufacturer 1=Murata, Manufacturer Part Number 1=GRM188R6YA475KE15D, Max Operating Temperature=85°C, Min Operating Temperature=-55°C, Package Quantity=4000, Supplier Part Number 1=490-7205-2-ND, Tolerance=10%, Voltage=35V, Capacitance=4.7uF, Case/Package=0603, ComponentLink1Description=https://datasheet.ciiva.com/46444/1769893-46444984.pdf?src-supplier=Element14, ComponentLink1URL=https://datasheet.ciiva.com/46444/1769893-46444984.pdf?src-supplier=Element14, ComponentLink2Description=https://datasheet.ciiva.com/46444/1769893-46444985.pdf?src-supplier=Element14, ComponentLink2URL=https://datasheet.ciiva.com/46444/1769893-46444985.pdf?src-supplier=Element14, ComponentLink3Description=https://datasheet.ciiva.com/14906/partnumbering-e-01-14906426.pdf?src-supplier=Digi-Key, ComponentLink3URL=https://datasheet.ciiva.com/14906/partnumbering-e-01-14906426.pdf?src-supplier=Digi-Key, ComponentLink4Description=https://datasheet.ciiva.com/14906/partnumbering-e-01-14906427.pdf?src-supplier=Digi-Key, ComponentLink4URL=https://datasheet.ciiva.com/14906/partnumbering-e-01-14906427.pdf?src-supplier=Digi-Key, ComponentLink5Description=https://datasheet.ciiva.com/14906/partnumbering-e-01-14906428.pdf?src-supplier=Digi-Key, ComponentLink5URL=https://datasheet.ciiva.com/14906/partnumbering-e-01-14906428.pdf?src-supplier=Digi-Key, Composition=Ceramic, Depth=0.8mm, Height=0.8mm, Lead Free="Lead Free", Length=1.6mm, Material=Ceramic, Mount="Surface Mount", Packaging="Tape and Reel", Pricing 1="4000=0.09384, 8000=0.08832, 12000=0.08556, 28000=0.08280, 100000=0.07728 (USD)", REACH SVHC="No SVHC", RoHS=Yes, Stock 1=284000, Supplier 1=Digi-Key, Termination=SMD/SMT, Thickness=0.031inch, Voltage Rating=35V, Voltage Rating (DC)=35V, Weight=0.000222oz, Width=0.8mm
C4 C7 C16: library part "Cap NP", "0.1µF ±10% 50V Ceramic Capacitor X5R 0402 (1005 Metric)", Capacitance=100nF, Case/Package=0402, Dielectric=X5R, Manufacturer 1=Yageo, Manufacturer Part Number 1=CC0402KRX5R9BB104, Max Operating Temperature=85°C, Min Operating Temperature=-55°C, Supplier Part Number 1=311-3342-2-ND, Tolerance=10%, Voltage Rating=50V, ComponentLink1Description=http://www.yageo.com/documents/recent/UPY-GPHC_X5R_4V-to-50V_23.pdf?src-supplier=Digi-Key, ComponentLink1URL=http://www.yageo.com/documents/recent/UPY-GPHC_X5R_4V-to-50V_23.pdf?src-supplier=Digi-Key, ComponentLink2Description=http://www.yageo.com/documents/recent/UPY-GPHC_X5R_4V-to-50V_25.pdf?src-supplier=Digi-Key, ComponentLink2URL=http://www.yageo.com/documents/recent/UPY-GPHC_X5R_4V-to-50V_25.pdf?src-supplier=Digi-Key, Halogen Free="Halogen Free", Lead Free="Lead Free", Length=0.039inch, Mount="Surface Mount", Packaging="Tape and Reel", Pricing 1="10000=0.00666, 20000=0.00634, 30000=0.00602, 50000=0.00539, 100000=0.00476 (USD)", RoHS=Yes, Stock 1=827411, Supplier 1=Digi-Key, Thickness=0.022inch, Voltage Rating (DC)=50V, Width=0.02inch
C5 C14: library part "Cap NP", "Non-polarized Capactior", Supplier Part Number 1=490-11435-1-ND, Supplier 1=Digi-Key
C8: library part "Cap NP", "100pF ±1% 50V Ceramic Capacitor C0G, NP0 0402 (1005 Metric)", Case Code (Imperial)=0402, Case Code (Metric)=1005, Dielectric=C0G, Dielectric Material=Ceramic, Manufacturer 1="Kyocera AVX", Manufacturer Part Number 1=04025A101FAT2A, Max Operating Temperature=125°C, Min Operating Temperature=-55°C, Package Quantity=1, Supplier Part Number 1=478-3658-2-ND, Tolerance=1%, Voltage=50V, Capacitance=100pF, Case/Package=0402, ComponentLink1Description=https://datasheet.ciiva.com/1123/759117-1123472.pdf?src-supplier=Element14, ComponentLink1URL=https://datasheet.ciiva.com/1123/759117-1123472.pdf?src-supplier=Element14, ComponentLink2Description=https://datasheet.ciiva.com/153/ccog-153075.pdf?src-supplier=Digi-Key, ComponentLink2URL=https://datasheet.ciiva.com/153/ccog-153075.pdf?src-supplier=Digi-Key, ComponentLink3Description=https://datasheet.ciiva.com/153/ccog-153076.pdf?src-supplier=Digi-Key, ComponentLink3URL=https://datasheet.ciiva.com/153/ccog-153076.pdf?src-supplier=Digi-Key, ComponentLink4Description=https://datasheet.ciiva.com/153/ccog-153077.pdf?src-supplier=Digi-Key, ComponentLink4URL=https://datasheet.ciiva.com/153/ccog-153077.pdf?src-supplier=Digi-Key, ComponentLink5Description=https://datasheet.ciiva.com/28453/1796416-28453765.pdf?src-supplier=Element14, ComponentLink5URL=https://datasheet.ciiva.com/28453/1796416-28453765.pdf?src-supplier=Element14, ComponentLink6Description=https://datasheet.ciiva.com/5994/759117-5994870.pdf?src-supplier=Farnell, ComponentLink6URL=https://datasheet.ciiva.com/5994/759117-5994870.pdf?src-supplier=Farnell, ComponentLink7Description=https://datasheet.ciiva.com/22693/759117-22693575.pdf?src-supplier=Element14, ComponentLink7URL=https://datasheet.ciiva.com/22693/759117-22693575.pdf?src-supplier=Element14, ComponentLink8Description=https://datasheet.ciiva.com/28586/759117-28586552.pdf?src-supplier=Element14, ComponentLink8URL=https://datasheet.ciiva.com/28586/759117-28586552.pdf?src-supplier=Element14, ComponentLink9Description=https://datasheet.ciiva.com/14604/70001039-14604457.pdf?src-supplier=Allied+Electronics, ComponentLink9URL=https://datasheet.ciiva.com/14604/70001039-14604457.pdf?src-supplier=Allied+Electronics, ComponentLink10Description=https://datasheet.ciiva.com/22619/1796416-22619721.pdf?src-supplier=Element14, ComponentLink10URL=https://datasheet.ciiva.com/22619/1796416-22619721.pdf?src-supplier=Element14, ComponentLink11Description=https://datasheet.ciiva.com/7709/84496-7709757.pdf?src-supplier=Element14, ComponentLink11URL=https://datasheet.ciiva.com/7709/84496-7709757.pdf?src-supplier=Element14, Depth=0.5mm, Height=0.56mm, Lead Free="Lead Free", Length=1mm, Mount="Surface Mount,PCB", Number of Pins=2, Packaging="Tape and Reel", Pricing 1="10000=0.03080, 20000=0.02926, 30000=0.02772, 50000=0.02541, 100000=0.02099 (USD)", Radiation Hardening=No, REACH SVHC="No SVHC", RoHS=Yes, Stock 1=1289982, Supplier 1=Digi-Key, Termination=SMD/SMT, Thickness=0.022inch, Voltage Rating=50V, Voltage Rating (DC)=50V, Width=0.02inch
C10: library part "Cap NP", "0.8pF ±0.25pF 50V Ceramic Capacitor C0G, NP0 0402 (1005 Metric)", Case Code (Imperial)=0402, Case Code (Metric)=1005, Manufacturer 1=Murata, Manufacturer Part Number 1=GRM1555C1HR80CA01D, Max Operating Temperature=125°C, Min Operating Temperature=-55°C, Package Quantity=10000, Supplier Part Number 1=490-12695-2-ND, Voltage Rating=50V, Capacitance=0.8pF, Case/Package=0402, ComponentLink1Description=https://datasheet.ciiva.com/29538/partnumbering-e-01-29538363.pdf?src-supplier=Digi-Key, ComponentLink1URL=https://datasheet.ciiva.com/29538/partnumbering-e-01-29538363.pdf?src-supplier=Digi-Key, ComponentLink2Description=https://datasheet.ciiva.com/5418/c02e-5418252.pdf?src-supplier=Mouser, ComponentLink2URL=https://datasheet.ciiva.com/5418/c02e-5418252.pdf?src-supplier=Mouser, Length=0.039inch, Mount="Surface Mount", Packaging="Tape and Reel", Pricing 1="10000=0.00819, 20000=0.00780, 30000=0.00741, 50000=0.00663, 100000=0.00585 (USD)", RoHS=Yes, Stock 1=80000, Supplier 1=Digi-Key, Termination=SMD/SMT, Thickness=0.022inch, Voltage Rating (DC)=50V, Width=0.02inch
C11 C12 C13: library part "Cap NP", "Non-polarized Capactior"
C17: library part "Cap NP", "MURATA - GRM155R60J475ME87D - SMD Multilayer Ceramic Capacitor, 4.7 µF, 6.3 V, 0402 [1005 Metric], ± 20%, X5R, GRM Series", Case Code (Imperial)=0402, Case Code (Metric)=1005, Dielectric=X5R, Manufacturer 1=Murata, Manufacturer Part Number 1=GRM155R60J475ME87D, Max Operating Temperature=85°C, Min Operating Temperature=-55°C, Package Quantity=1, Supplier Part Number 1=490-5408-1-ND, Tolerance=20%, Voltage=6.3V, Capacitance=4.7uF, Case/Package=0402, Category="Ceramic Capacitors", ComponentLink1Description=https://datasheet.ciiva.com/3779/21116grm155r60j475me8723-3779229.pdf?src-supplier=Arrow+Electronics, ComponentLink1URL=https://datasheet.ciiva.com/3779/21116grm155r60j475me8723-3779229.pdf?src-supplier=Arrow+Electronics, ComponentLink2Description=https://datasheet.ciiva.com/136/partnumbering-e-01-136783.pdf?src-supplier=Digi-Key, ComponentLink2URL=https://datasheet.ciiva.com/136/partnumbering-e-01-136783.pdf?src-supplier=Digi-Key, ComponentLink3Description=https://datasheet.ciiva.com/136/partnumbering-e-01-136784.pdf?src-supplier=Digi-Key, ComponentLink3URL=https://datasheet.ciiva.com/136/partnumbering-e-01-136784.pdf?src-supplier=Digi-Key, Depth=0.5mm, Height=0.5mm, Lead Free="Lead Free", Length=1mm, Mount="Surface Mount", Packaging="Tape and Reel", Pricing 1="1=0.14000, 10=0.10100, 50=0.05720, 100=0.04740, 500=0.03322, 1000=0.02750, 2500=0.02559, 5000=0.02341 (USD)", Radiation Hardening=No, REACH SVHC="No SVHC", RoHS=Yes, Stock 1=1245512, Supplier 1=Digi-Key, Thickness=0.022inch, Voltage Rating=6.3V, Voltage Rating (DC)=6.3V, Width=0.02inch
C18: library part "Cap NP", "CAP CER 1UF 10V X5R 0402", Case Code (Imperial)=0402, Case Code (Metric)=1005, Dielectric=X5R, Manufacturer 1=Samsung, Manufacturer Part Number 1=CL05A105KP5NNNC, Max Operating Temperature=85°C, Min Operating Temperature=-55°C, Package Quantity=1, Supplier Part Number 1=1276-1076-1-ND, Tolerance=10%, Voltage Rating=10V, Capacitance=1uF, Case/Package=0402, Category="Ceramic Capacitors", ComponentLink1Description=https://datasheet.ciiva.com/15195/getdatasheetpartid-358390-15195630.pdf?src-supplier=Verical, ComponentLink1URL=https://datasheet.ciiva.com/15195/getdatasheetpartid-358390-15195630.pdf?src-supplier=Verical, ComponentLink2Description=https://datasheet.ciiva.com/29198/459159-da-01-en-vs-kondensator-0402-29198341.pdf?src-supplier=Conrad, ComponentLink2URL=https://datasheet.ciiva.com/29198/459159-da-01-en-vs-kondensator-0402-29198341.pdf?src-supplier=Conrad, Contact Plating=Tin, Depth=0.5mm, Height=0.5mm, Length=1mm, Material=Ceramic, Mount="Surface Mount", Packaging="Tape and Reel", Pricing 1="1=0.10000, 10=0.03900, 50=0.02140, 100=0.01750, 500=0.01252, 1000=0.00983, 2500=0.00894, 5000=0.00822 (USD)", Radiation Hardening=No, RoHS=Yes, Stock 1=5830319, Supplier 1=Digi-Key, Thickness=0.022inch, Width=0.02inch
D1: "Zener Diode 12V 500mW ±5% Surface Mount SOD-123", Case/Package=SOD-123-2, Forward Voltage=900mV, Manufacturer 1=Diodes, Max Operating Temperature=150°C, Max Power Dissipation=500mW, Max Reverse Leakage Current=100nA, Min Operating Temperature=-65°C, Output Current=50mA, Package Quantity=10000, Supplier Part Number 1=BZT52C1213-FDITR-ND, Test Current=5mA, Tolerance=5%, Voltage Rating (DC)=12V, ComponentLink1Description=https://datasheet.ciiva.com/26943/getdatasheetpartid-38893-26943274.pdf?src-supplier=Verical, ComponentLink1URL=https://datasheet.ciiva.com/26943/getdatasheetpartid-38893-26943274.pdf?src-supplier=Verical, Contact Plating=Tin,Matte, Element Configuration=Single, ESD Protection=No, Height=1.35mm, Impedance=25R, Lead Free="Lead Free", Length=2.85mm, Manufacturer Part Number 1=BZT52C12-13-F, Mount="Surface Mount", Number of Pins=2, Packaging="Tape and Reel", Peak Reverse Current=100nA, Power Dissipation=500mW, Power Rating=500mW, Pricing 1="10000=0.02576, 30000=0.02530, 50000=0.02273, 100000=0.02015, 250000=0.01970 (USD)", Radiation Hardening=No, RoHS=Yes, Stock 1=88458, Supplier 1=Digi-Key, Voltage Tolerance=5%, Weight=0.000353oz, Width=1.7mm, Zener Current=100nA, Zener Voltage=12V
F1: "Polymeric PTC Resettable Fuse 33V 1.85A Ih Surface Mount 2920 (7351 Metric), Concave", Case Code (Imperial)=2920, Case Code (Metric)=7351, Hold Current=1.85A, Manufacturer 1=Bel, Manufacturer Part Number 1=0ZCF0185FF2C, Max Current Rating=40A, Package Quantity=1, Supplier Part Number 1=507-1747-2-ND, Trip Current=3.7A, ComponentLink1Description=https://datasheet.ciiva.com/18550/0zcf-18550652.pdf?src-supplier=Digi-Key, ComponentLink1URL=https://datasheet.ciiva.com/18550/0zcf-18550652.pdf?src-supplier=Digi-Key, ComponentLink2Description=https://datasheet.ciiva.com/18550/0zcf-18550653.pdf?src-supplier=Digi-Key, ComponentLink2URL=https://datasheet.ciiva.com/18550/0zcf-18550653.pdf?src-supplier=Digi-Key, ComponentLink3Description=https://datasheet.ciiva.com/18550/0zcf-18550654.pdf?src-supplier=Digi-Key, ComponentLink3URL=https://datasheet.ciiva.com/18550/0zcf-18550654.pdf?src-supplier=Digi-Key, Lead Free="Lead Free", Packaging="Tape and Reel", Pricing 1="2000=0.13090, 4000=0.12320, 6000=0.11550, 10000=0.10780 (USD)", RoHS=Yes, Stock 1=76000, Supplier 1=Digi-Key, Time to Trip=2.5s
J1: library part TC2030-CTX, "CBL PLUG-OF-NAILS TO CORTEX SWD", Manufacturer 1=Tag-Connect, ComponentLink1Description=http://www.tag-connect.com/Materials/TC2030-CTX.pdf?src-supplier=Digi-Key, ComponentLink1URL=http://www.tag-connect.com/Materials/TC2030-CTX.pdf?src-supplier=Digi-Key, Manufacturer Part Number 1=TC2030-CTX, RoHS=Yes, Stock 1=87, Supplier 1=Digi-Key
J2 J4 J7: "Conn Unshrouded Header HDR 10 POS 2.54mm Solder ST Top Entry SMD T/R", Color=Black, Contact Resistance=30mR, Current Rating=1A, Insulation Resistance=100MR, Manufacturer 1="Amphenol FCI", Manufacturer Part Number 1=20021121-00010C4LF, Max Operating Temperature=85°C, Max Voltage Rating (AC)=125V, Min Operating Temperature=-40°C, Package Quantity=600, ComponentLink1Description=https://datasheet.ciiva.com/26853/getdatasheetpartid-177140-26853984.pdf?src-supplier=Verical, ComponentLink1URL=https://datasheet.ciiva.com/26853/getdatasheetpartid-177140-26853984.pdf?src-supplier=Verical, ComponentLink2Description=https://datasheet.ciiva.com/11749/0900766b8118d62a-11749057.pdf?src-supplier=RSComponents, ComponentLink2URL=https://datasheet.ciiva.com/11749/0900766b8118d62a-11749057.pdf?src-supplier=RSComponents, ComponentLink3Description=https://datasheet.ciiva.com/1433/20021121-1433280.pdf?src-supplier=Element14, ComponentLink3URL=https://datasheet.ciiva.com/1433/20021121-1433280.pdf?src-supplier=Element14, ComponentLink4Description=https://datasheet.ciiva.com/9474/20021121-9474140.pdf?src-supplier=Avnet, ComponentLink4URL=https://datasheet.ciiva.com/9474/20021121-9474140.pdf?src-supplier=Avnet, ComponentLink5Description=https://datasheet.ciiva.com/409/20021121-409149.pdf?src-supplier=Digi-Key, ComponentLink5URL=https://datasheet.ciiva.com/409/20021121-409149.pdf?src-supplier=Digi-Key, ComponentLink6Description=https://datasheet.ciiva.com/409/20021121-409150.pdf?src-supplier=Digi-Key, ComponentLink6URL=https://datasheet.ciiva.com/409/20021121-409150.pdf?src-supplier=Digi-Key, ComponentLink7Description=https://datasheet.ciiva.com/16691/20021121-16691022.pdf?src-supplier=Avnet+Europe, ComponentLink7URL=https://datasheet.ciiva.com/16691/20021121-16691022.pdf?src-supplier=Avnet+Europe, ComponentLink8Description=https://datasheet.ciiva.com/409/20021121-409151.pdf?src-supplier=Digi-Key, ComponentLink8URL=https://datasheet.ciiva.com/409/20021121-409151.pdf?src-supplier=Digi-Key, ComponentLink9Description=https://datasheet.ciiva.com/5130/20021121-5130207.pdf?src-supplier=Mouser, ComponentLink9URL=https://datasheet.ciiva.com/5130/20021121-5130207.pdf?src-supplier=Mouser, Connector Type="Male Pin,Header", Contact Material="Copper Alloy,Copper,Gold", Contact Mating Length=0.12inch, Contact Plating=Gold, Depth=3.4mm, Gender=Male, Housing Color=Black, Housing Material=Thermoplastic, Length=6.35mm, Mount="Surface Mount", Number of Contacts=10, Number of Positions=10, Number of Rows=2, Orientation=Straight, Packaging="Tape and Reel", Pitch=1.27mm, Pricing 1="600=0.48798, 1200=0.43376, 1800=0.40665, 3000=0.39310, 6000=0.37954, 15000=0.35243 (USD)", Radiation Hardening=No, REACH SVHC="No SVHC", RoHS=Yes, Row Spacing=0.05inch, Stack Height=3mm, Stock 1=75000, Supplier 1=Digi-Key, System=Connector, Termination=Solder, Voltage Rating=125V
J3: "PCB Mounted Jacks - Single Port, Multi-port and Stacked MJ, RJ45, SMT, SHLD, PANEL GRD", Manufacturer 1=TE, Package=None, Availability=Unavailable, Centerline_Pitch="1.02 mm[.04 in]", EU_RoHS_Compliance=Compliant, Manufacturer Part Number 1=6339160-1, MF="TE Connectivity", MP=6339160-1, Number_of_Positions=8, Price=None, SnapEDA_Link=https://www.snapeda.com/parts/6339160-1/TE%20Connectivity%20AMP%20Connectors/view-part/517213/?ref=snap, TE_purchase_URL=https://www.te.com/usa-en/product-6339160-1.html?te_bu=Cor&te_type=disp&te_campaign=seda_glo_cor-seda-global-disp-prtnr-fy19-seda-model-bom-cta_sma-317_1&elqCampaignId=32493
J5 J6: "CONN HEADER SMD R/A 2POS 2MM", Color=Natural, Manufacturer 1=JST, Supplier Part Number 1=455-2650-2-ND, ComponentLink1Description=https://datasheet.ciiva.com/740/epa-f-740784.pdf?src-supplier=Digi-Key, ComponentLink1URL=https://datasheet.ciiva.com/740/epa-f-740784.pdf?src-supplier=Digi-Key, ComponentLink2Description=https://datasheet.ciiva.com/16487/epa-f-16487127.pdf?src-supplier=Future+Electronics, ComponentLink2URL=https://datasheet.ciiva.com/16487/epa-f-16487127.pdf?src-supplier=Future+Electronics, ComponentLink3Description=https://datasheet.ciiva.com/726/epa-f-726798.pdf?src-supplier=Digi-Key, ComponentLink3URL=https://datasheet.ciiva.com/726/epa-f-726798.pdf?src-supplier=Digi-Key, ComponentLink4Description=https://datasheet.ciiva.com/740/epa-f-740798.pdf?src-supplier=Digi-Key, ComponentLink4URL=https://datasheet.ciiva.com/740/epa-f-740798.pdf?src-supplier=Digi-Key, Connector Type="Male Pin", Contact Plating=Tin, Fastening Type=Ramp, Lead Free="Lead Free", Manufacturer Part Number 1=SM02B-PASS-TBT(LF)(SN), Mount="Surface Mount", Number of Positions=2, Number of Rows=1, Packaging="Cut Tape", Pitch=0.079inch, Pricing 1="1000=0.30811, 2000=0.29877, 3000=0.28010, 5000=0.27076, 10000=0.25209, 25000=0.24275 (USD)", RoHS=Yes, Stock 1=191000, Supplier 1=Digi-Key, System=Connector, Termination=Solder
J8: library part Component_1, "CONN HEADER VERT 3POS 2.54MM", Manufacturer 1="Würth Elektronik", Manufacturer Part Number 1=61300311121
L3: library part Inductor, "3.9nH Unshielded Thin Film Inductor 170mA 500mOhm Max 0402 (1005 Metric)", Case Code (Imperial)=0402, Case Code (Metric)=1005, Current Rating=170mA, DC Resistance (DCR)=500mR, Manufacturer 1=Murata, Manufacturer Part Number 1=LQP15MN3N9B02D, Max Operating Temperature=85°C, Min Operating Temperature=-40°C, Package Quantity=10000, Self Resonant Frequency=6GHz, Supplier Part Number 1=490-1131-2-ND, Test Frequency=500MHz, Case/Package=0402, ComponentLink1Description=https://datasheet.ciiva.com/27054/1865137-27054329.pdf?src-supplier=Jameco, ComponentLink1URL=https://datasheet.ciiva.com/27054/1865137-27054329.pdf?src-supplier=Jameco, ComponentLink2Description=https://datasheet.ciiva.com/11799/0900766b80f155d9-11799807.pdf?src-supplier=RSComponents, ComponentLink2URL=https://datasheet.ciiva.com/11799/0900766b80f155d9-11799807.pdf?src-supplier=RSComponents, ComponentLink3Description=https://datasheet.ciiva.com/16362/l0075s0084lqp15m-16362181.pdf?src-supplier=Future+Electronics, ComponentLink3URL=https://datasheet.ciiva.com/16362/l0075s0084lqp15m-16362181.pdf?src-supplier=Future+Electronics, ComponentLink4Description=https://datasheet.ciiva.com/18230/getdatasheetpartid-153200-18230711.pdf?src-supplier=Verical, ComponentLink4URL=https://datasheet.ciiva.com/18230/getdatasheetpartid-153200-18230711.pdf?src-supplier=Verical, ComponentLink5Description=https://datasheet.ciiva.com/8510/l0075s0084lqp15m-8510329.pdf?src-supplier=Avnet, ComponentLink5URL=https://datasheet.ciiva.com/8510/l0075s0084lqp15m-8510329.pdf?src-supplier=Avnet, ComponentLink6Description=https://datasheet.ciiva.com/4976/product-4976732.pdf?src-supplier=Mouser, ComponentLink6URL=https://datasheet.ciiva.com/4976/product-4976732.pdf?src-supplier=Mouser, ComponentLink7Description=https://datasheet.ciiva.com/1039/l0075s0084lqp15m-1039837.pdf?src-supplier=Digi-Key, ComponentLink7URL=https://datasheet.ciiva.com/1039/l0075s0084lqp15m-1039837.pdf?src-supplier=Digi-Key, ComponentLink8Description=https://datasheet.ciiva.com/1039/l0075s0084lqp15m-1039838.pdf?src-supplier=Digi-Key, ComponentLink8URL=https://datasheet.ciiva.com/1039/l0075s0084lqp15m-1039838.pdf?src-supplier=Digi-Key, ComponentLink9Description=https://datasheet.ciiva.com/1039/l0075s0084lqp15m-1039839.pdf?src-supplier=Digi-Key, ComponentLink9URL=https://datasheet.ciiva.com/1039/l0075s0084lqp15m-1039839.pdf?src-supplier=Digi-Key, ComponentLink10Description=https://datasheet.ciiva.com/8510/l0075s0084lqp15m-8510975.pdf?src-supplier=Avnet, ComponentLink10URL=https://datasheet.ciiva.com/8510/l0075s0084lqp15m-8510975.pdf?src-supplier=Avnet, Composition="Thin Film", Core Material=Non-Magnetic, DC Current=170mA, Depth=0.6mm, Height=0.35mm, Height - Seated (Max)=0.018inch, Inductance=3.9nH, Lead Free="Lead Free", Length=1.1mm, Max DC Current=170mA, Military Standard=Not, Mount="Surface Mount", Packaging="Tape and Reel", Pricing 1="10000=0.05344, 30000=0.05177, 50000=0.05010, 100000=0.04843 (USD)", Q Factor=13, Radiation Hardening=No, RoHS=Yes, Shielding=Unshielded, Stock 1=40000, Supplier 1=Digi-Key, Termination=SMD/SMT, Width=0.5mm
L4: library part Inductor, "10µH Unshielded Wirewound Inductor 80mA 360mOhm 0603 (1608 Metric)", Case/Package=0603, Inductance=10H, Manufacturer 1=Taiyo, Manufacturer Part Number 1=LBMF1608T100K, Self Resonant Frequency=32MHz, Supplier Part Number 1=587-1714-2-ND, Halogen Free="Halogen Free", Height=800um, Lead Free="Lead Free", Length=1.6mm, Packaging="Cut Tape", Pricing 1="3000=0.08100, 6000=0.07650, 15000=0.07200, 30000=0.06975, 75000=0.06750, 150000=0.06525 (USD)", RoHS=No, Shielding=Unshielded, Stock 1=0, Supplier 1=Digi-Key, Width=800um
LED1: "LED Multi-Color Chip Red/Green/Blue 620nm/524nm/471nm 20mA 4-Pin PLCC T/R", Manufacturer 1=Broadcom, Supplier Part Number 1=516-3906-6-ND, ComponentLink1Description=http://www.farnell.com/datasheets/2608172.pdf?src-supplier=Farnell, ComponentLink1URL=http://www.farnell.com/datasheets/2608172.pdf?src-supplier=Farnell, ComponentLink2Description=https://media.digikey.com/pdf/Data%20Sheets/Avago%20PDFs/ASMB-KTF0-0A306.pdf?src-supplier=Digi-Key, ComponentLink2URL=https://media.digikey.com/pdf/Data%20Sheets/Avago%20PDFs/ASMB-KTF0-0A306.pdf?src-supplier=Digi-Key, ComponentLink3Description=http://datasheet.octopart.com/ASMB-KTF0-0A306-Broadcom-datasheet-101667862.pdf?src-supplier=Avago, ComponentLink3URL=http://datasheet.octopart.com/ASMB-KTF0-0A306-Broadcom-datasheet-101667862.pdf?src-supplier=Avago, Manufacturer Part Number 1=ASMB-KTF0-0A306, Pricing 1="1=0.43000, 10=0.31200, 100=0.20350, 500=0.14628, 1000=0.11448, 2500=0.10494 (USD)", RoHS=No, Stock 1=4838, Supplier 1=Digi-Key
LED2 LED3: library part LTST-C191KGKT, "Green 571nm LED Indication - Discrete 2V 0603 (1608 Metric)", Case Code (Imperial)=0603, Case Code (Metric)=1608, Color=Green, Forward Current=30mA, Forward Voltage=2V, Lens Color=Colorless, Manufacturer 1="Vishay Lite-On", Max Operating Temperature=85°C, Min Operating Temperature=-55°C, Package Quantity=1, Power Dissipation=75mW, Reverse Voltage=5V, Supplier Part Number 1=160-1446-2-ND, Test Current=20mA, Case/Package=0603, ComponentLink1Description=https://datasheet.ciiva.com/12400/100-ltst-c191kgkt-53586-12400818.pdf?src-supplier=Mouser, ComponentLink1URL=https://datasheet.ciiva.com/12400/100-ltst-c191kgkt-53586-12400818.pdf?src-supplier=Mouser, ComponentLink2Description=https://datasheet.ciiva.com/11773/0900766b80dc02b1-11773629.pdf?src-supplier=RSComponents, ComponentLink2URL=https://datasheet.ciiva.com/11773/0900766b80dc02b1-11773629.pdf?src-supplier=RSComponents, ComponentLink3Description=https://datasheet.ciiva.com/16215/ltst-c191kgkt-16215151.pdf?src-supplier=Future+Electronics, ComponentLink3URL=https://datasheet.ciiva.com/16215/ltst-c191kgkt-16215151.pdf?src-supplier=Future+Electronics, ComponentLink4Description=https://datasheet.ciiva.com/2109/s-110-ltst-c191kgkt-2109973.pdf?src-supplier=Digi-Key, ComponentLink4URL=https://datasheet.ciiva.com/2109/s-110-ltst-c191kgkt-2109973.pdf?src-supplier=Digi-Key, ComponentLink5Description=https://datasheet.ciiva.com/2109/s-110-ltst-c191kgkt-2109974.pdf?src-supplier=Digi-Key, ComponentLink5URL=https://datasheet.ciiva.com/2109/s-110-ltst-c191kgkt-2109974.pdf?src-supplier=Digi-Key, ComponentLink6Description=https://datasheet.ciiva.com/2109/s-110-ltst-c191kgkt-2109975.pdf?src-supplier=Digi-Key, ComponentLink6URL=https://datasheet.ciiva.com/2109/s-110-ltst-c191kgkt-2109975.pdf?src-supplier=Digi-Key, ComponentLink7Description=https://datasheet.ciiva.com/15223/getdatasheetpartid-103913-15223276.pdf?src-supplier=Verical, ComponentLink7URL=https://datasheet.ciiva.com/15223/getdatasheetpartid-103913-15223276.pdf?src-supplier=Verical, Depth=0.8mm, Dominant Wavelength=571nm, Height=0.55mm, Illumination Color=Green, Lead Free="Lead Free", Length=1.6mm, Lens Style=Diffused,Colorless,Rectangular,Clear, Lens Transparency=Clear, Luminous Intensity=35mcd, Manufacturer Part Number 1=LTST-C191KGKT, Mount="Surface Mount", Number of Elements=1, Number of LEDs=1, Number of Pins=2, Packaging="Tape and Reel", Power Rating=75mW, Pricing 1="5000=0.04040, 10000=0.03636, 25000=0.03232, 50000=0.02929, 125000=0.02727 (USD)", Radiation Hardening=No, RoHS=Yes, Stock 1=975000, Supplier 1=Digi-Key, Viewing Angle=130°, Wavelength=574nm, Width=0.8mm
Q1 Q2 Q3: "Trans MOSFET N-CH 30V 0.1A 3-Pin UMT T/R", Case/Package=SOT-323, Continuous Drain Current (ID)=100mA, Drain to Source Breakdown Voltage=30V, Drain to Source Resistance=7R, Gate to Source Voltage (Vgs)=20V, Input Capacitance=13pF, Manufacturer 1=Rohm, Max Operating Temperature=150°C, Max Power Dissipation=200mW, Min Operating Temperature=-55°C, On-State Resistance=13R, Package Quantity=3000, Supplier Part Number 1=2SK3018T106CT-ND, Threshold Voltage=1.5V, Category=MOSFETs, ComponentLink1Description=https://datasheet.ciiva.com/13043/2sk3018-209190-13043441.pdf?src-supplier=Mouser, ComponentLink1URL=https://datasheet.ciiva.com/13043/2sk3018-209190-13043441.pdf?src-supplier=Mouser, ComponentLink2Description=https://datasheet.ciiva.com/16307/2sk3018-16307708.pdf?src-supplier=Future+Electronics, ComponentLink2URL=https://datasheet.ciiva.com/16307/2sk3018-16307708.pdf?src-supplier=Future+Electronics, ComponentLink3Description=https://datasheet.ciiva.com/934/2sk3018-934635.pdf?src-supplier=Digi-Key, ComponentLink3URL=https://datasheet.ciiva.com/934/2sk3018-934635.pdf?src-supplier=Digi-Key, ComponentLink4Description=https://datasheet.ciiva.com/1188/2sk3018-1188589.pdf?src-supplier=Element14, ComponentLink4URL=https://datasheet.ciiva.com/1188/2sk3018-1188589.pdf?src-supplier=Element14, ComponentLink5Description=https://datasheet.ciiva.com/934/2sk3018-934636.pdf?src-supplier=Digi-Key, ComponentLink5URL=https://datasheet.ciiva.com/934/2sk3018-934636.pdf?src-supplier=Digi-Key, Contact Plating=Copper,Tin,Silver, Current Rating=100mA, Drain to Source Voltage (Vdss)=30V, Dual Supply Voltage=30V, Element Configuration=Single, Fall Time=35ns, Height=0.8mm, Lead Free="Lead Free", Length=2mm, Manufacturer Part Number 1=2SK3018T106, Mount="Surface Mount", Nominal Vgs=1.5V, Number of Pins=3, Packaging="Tape and Reel", Power Dissipation=200mW, Pricing 1="1=0.37000, 10=0.30100, 25=0.25200, 100=0.12320, 500=0.10276, 1000=0.07140 (USD)", Radiation Hardening=No, Rds On Max=8R, REACH SVHC="No SVHC", Rise Time=35ns, RoHS=Yes, Stock 1=40757, Supplier 1=Digi-Key, Termination=SMD/SMT, Turn-Off Delay Time=80ns, Turn-On Delay Time=15ns, Voltage Rating (DC)=30V, Width=1.25mm
Q4: "N-Channel 50V 220mA (Ta) 350mW (Ta) Surface Mount SOT-23-3", Case/Package=SOT-23, Continuous Drain Current (ID)=220mA, Drain to Source Breakdown Voltage=50V, Drain to Source Resistance=2.5R, Gate to Source Voltage (Vgs)=12V, Input Capacitance=58pF, Manufacturer 1="ON Semiconductor / Fairchild", Max Operating Temperature=150°C, Max Power Dissipation=350mW, Min Operating Temperature=-55°C, On-State Resistance=1.6R, Package Quantity=1, Supplier Part Number 1=BSS138KTR-ND, Threshold Voltage=600mV, ComponentLink1Description=https://datasheet.ciiva.com/16965/bss138k-16965154.pdf?src-supplier=Future+Electronics, ComponentLink1URL=https://datasheet.ciiva.com/16965/bss138k-16965154.pdf?src-supplier=Future+Electronics, ComponentLink2Description=https://datasheet.ciiva.com/931/bss138k-931784.pdf?src-supplier=Digi-Key, ComponentLink2URL=https://datasheet.ciiva.com/931/bss138k-931784.pdf?src-supplier=Digi-Key, ComponentLink3Description=https://datasheet.ciiva.com/931/bss138k-931785.pdf?src-supplier=Digi-Key, ComponentLink3URL=https://datasheet.ciiva.com/931/bss138k-931785.pdf?src-supplier=Digi-Key, ComponentLink4Description=https://datasheet.ciiva.com/8115/bss138k-8115354.pdf?src-supplier=Avnet, ComponentLink4URL=https://datasheet.ciiva.com/8115/bss138k-8115354.pdf?src-supplier=Avnet, ComponentLink5Description=https://datasheet.ciiva.com/931/bss138k-931783.pdf?src-supplier=Digi-Key, ComponentLink5URL=https://datasheet.ciiva.com/931/bss138k-931783.pdf?src-supplier=Digi-Key, Contact Plating=Tin,Matte, Drain to Source Voltage (Vdss)=50V, Element Configuration=Single, Fall Time=35ns, Height=0.93mm, Lead Free="Lead Free", Length=2.92mm, Manufacturer Part Number 1=BSS138K, Mount="Surface Mount", Nominal Vgs=600mV, Number of Elements=1, Number of Pins=3, Packaging="Tape and Reel", Power Dissipation=350mW, Pricing 1="3000=0.06968, 6000=0.06027, 9000=0.04998, 30000=0.04910, 75000=0.04410 (USD)", Rds On Max=1.6R, REACH SVHC="No SVHC", Rise Time=5ns, RoHS=Yes, Stock 1=162000, Supplier 1=Digi-Key, Turn-Off Delay Time=60ns, Turn-On Delay Time=5ns, Weight=0.03g, Width=1.3mm
R1 R2 R3 R4 R5 R12 R14: library part Res, "Resistor1 kOhms ±1% 0.063W, 1/16W Chip Resistor 0402 (1005 Metric) Moisture Resistant Thick Film", Case Code (Imperial)=0402, Case Code (Metric)=1005, Manufacturer 1=Samsung, Manufacturer Part Number 1=RC1005F102CS, Max Operating Temperature=155°C, Max Power Dissipation=63mW, Min Operating Temperature=-55°C, Resistance=1kR, Supplier Part Number 1=1276-3430-2-ND, Temperature Coefficient=100ppm/°C, Tolerance=1%, Voltage Rating (DC)=50V, Case/Package=0402, ComponentLink1Description=https://datasheet.ciiva.com/15196/getdatasheetpartid-499906-15196213.pdf?src-supplier=Verical, ComponentLink1URL=https://datasheet.ciiva.com/15196/getdatasheetpartid-499906-15196213.pdf?src-supplier=Verical, ComponentLink2Description=https://datasheet.ciiva.com/26185/chip-resistor-150112-1-26185573.pdf?src-supplier=Digi-Key, ComponentLink2URL=https://datasheet.ciiva.com/26185/chip-resistor-150112-1-26185573.pdf?src-supplier=Digi-Key, ComponentLink3Description=https://datasheet.ciiva.com/26185/chip-resistor-150112-1-26185542.pdf?src-supplier=Digi-Key, ComponentLink3URL=https://datasheet.ciiva.com/26185/chip-resistor-150112-1-26185542.pdf?src-supplier=Digi-Key, Composition="Thick Film", Contact Plating=Tin, Depth=0.5mm, Features="Moisture Resistant", Height=0.016inch, Lead Free="Lead Free", Length=1mm, Military Standard=Not, Number of Terminations=2, Packaging="Tape and Reel", Pricing 1="10000=0.00634, 30000=0.00557, 50000=0.00511, 100000=0.00501 (USD)", Radiation Hardening=No, RoHS=Yes, Stock 1=7720000, Supplier 1=Digi-Key, Width=0.02inch
R6: library part Res, "RES 0 OHM JUMPER 1/16W 0402", Manufacturer 1="Stackpole Electronics Inc", Manufacturer Part Number 1=RMCF0402ZT0R00